# EAGLE board arduino_block-Panel-v10 (EAGLE 6.6.0), part 1 of 4
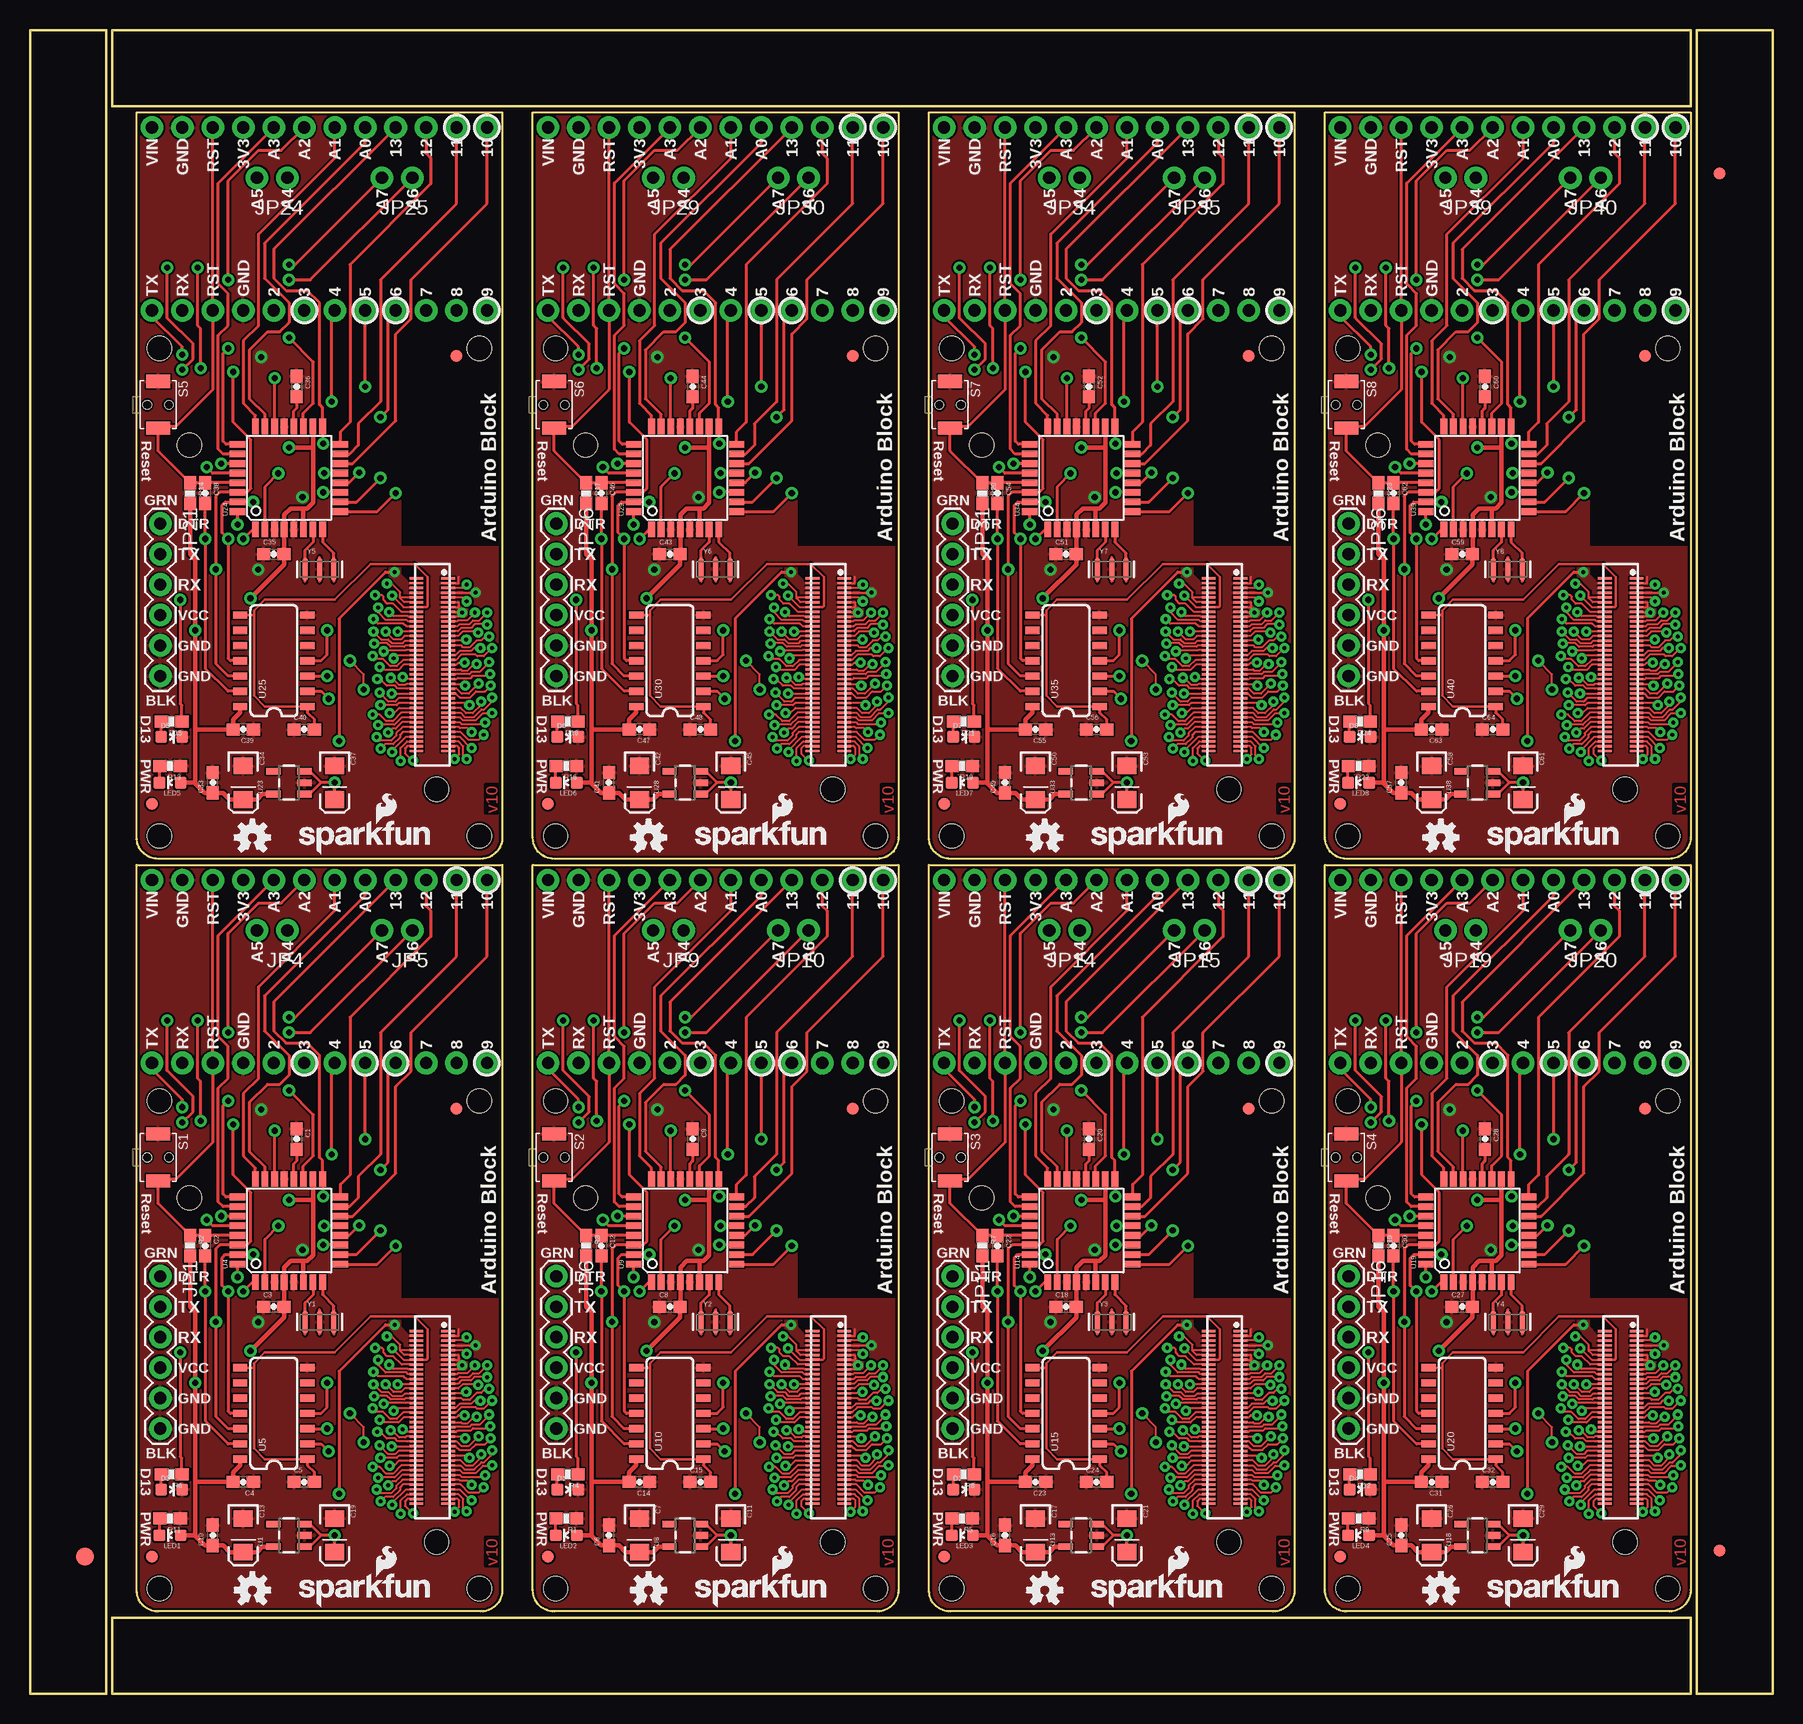
[diagram p0: board, top side]
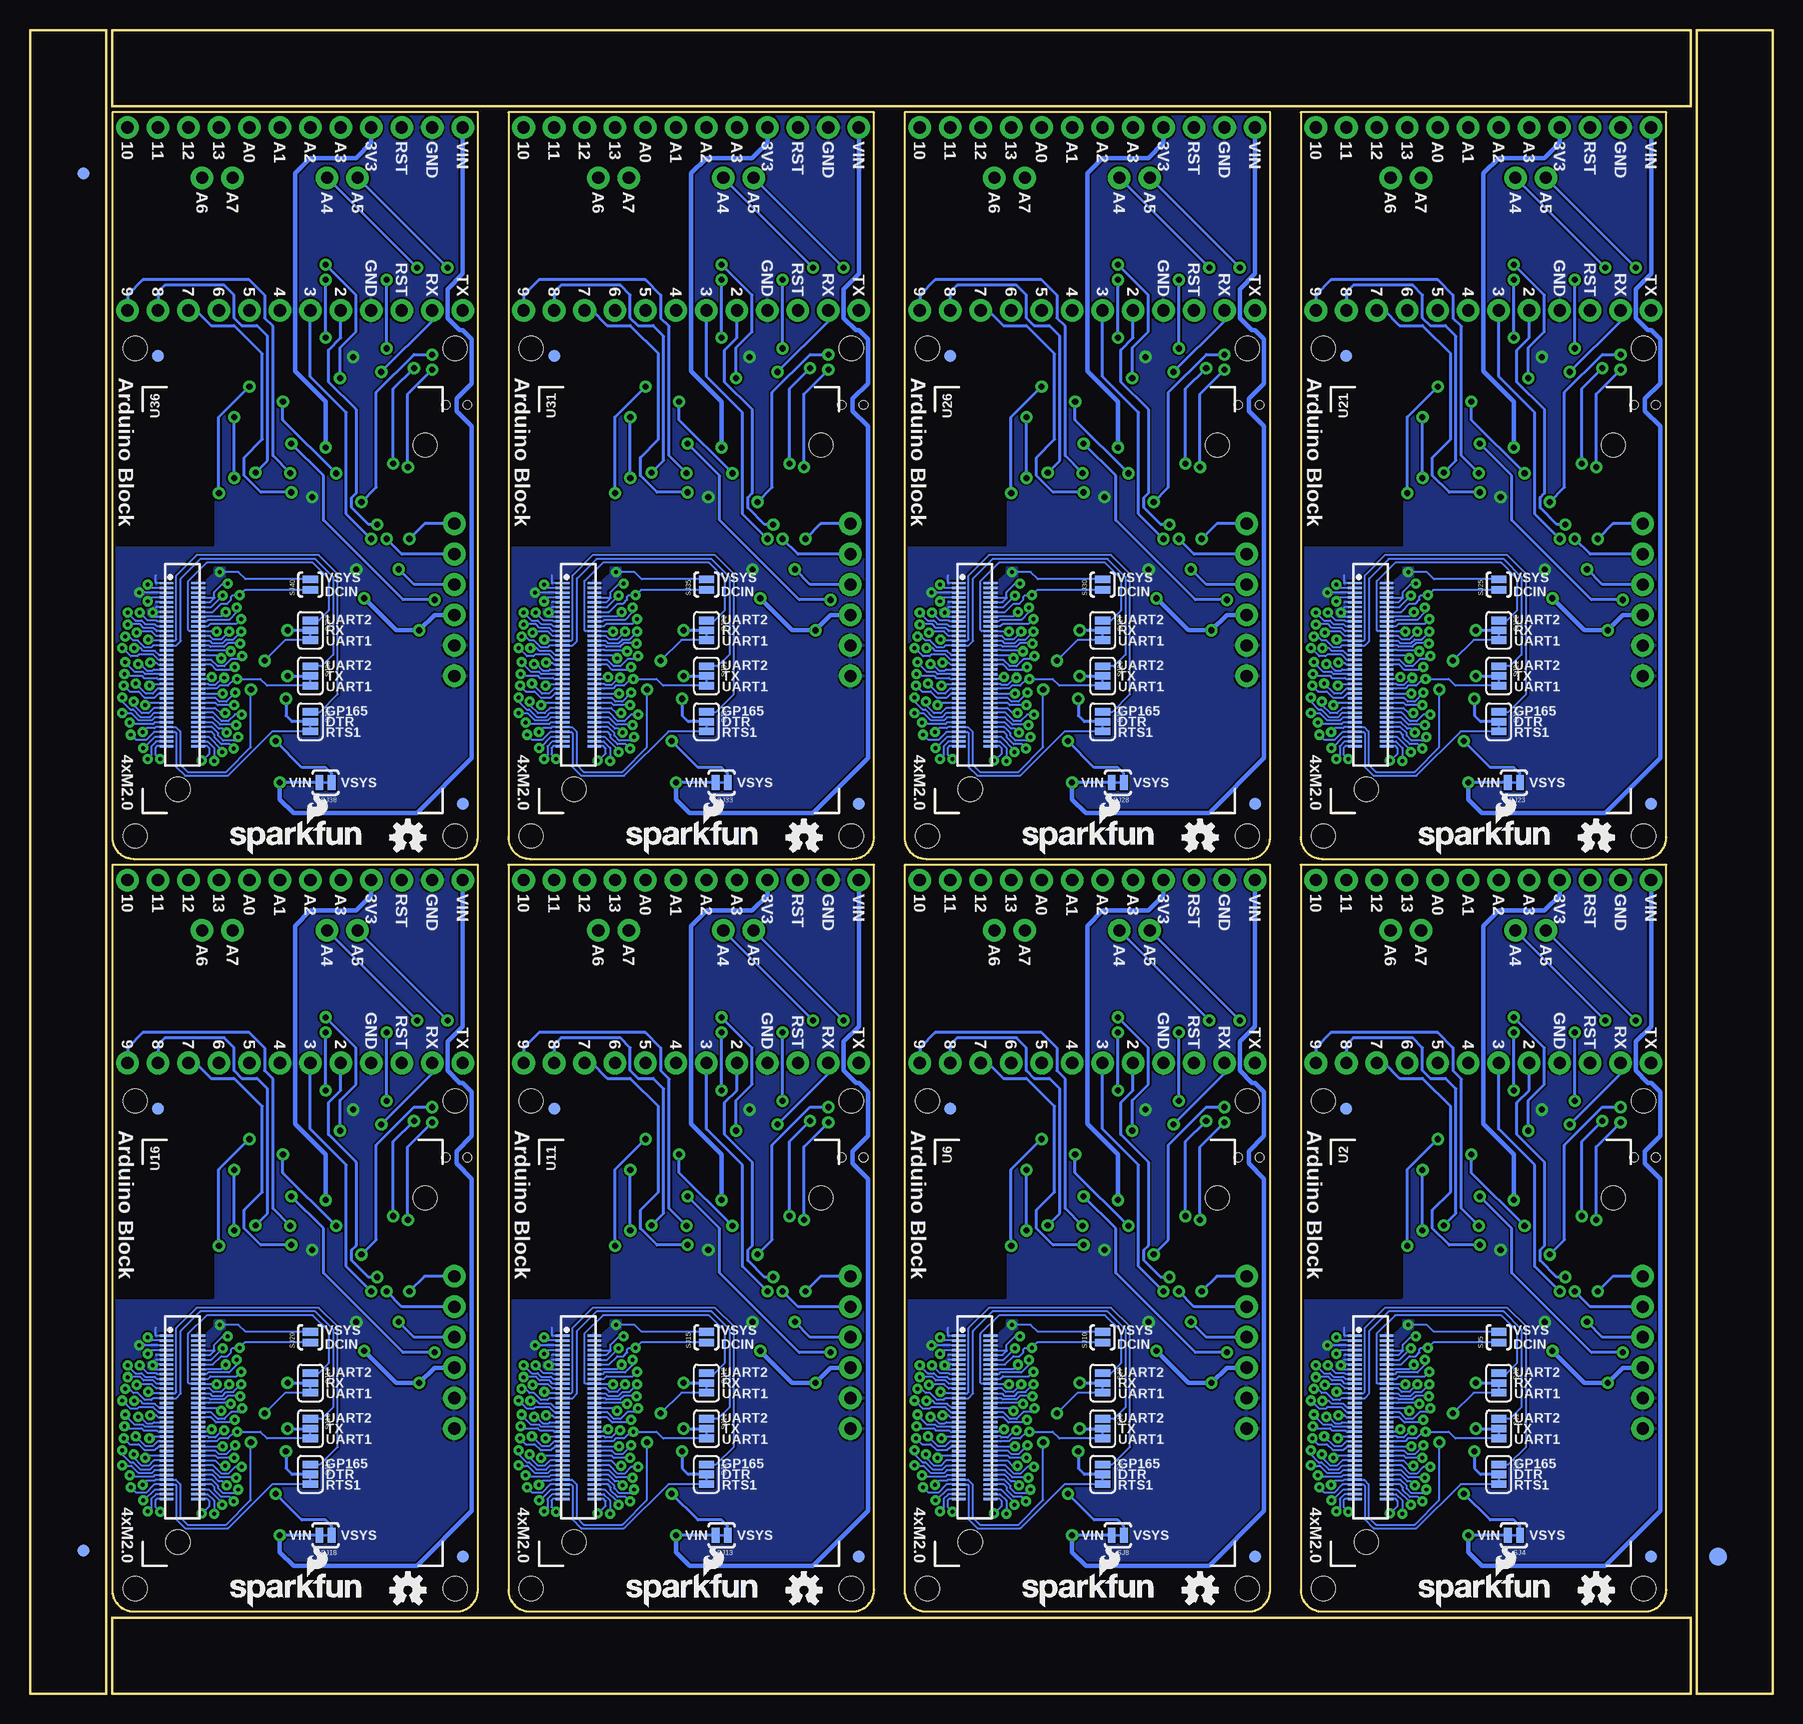
[diagram p1: board, bottom side, seen from below]

Size 145.29 x 138.68 mm. Coordinates in mm from the lower left corner, seen from the top.
Outline: 39.37,69.09 39.37,8.64 arc-90 37.59,6.86 10.67,6.86 arc-90 8.89,8.64 8.89,69.09 39.37,69.09
Outline: 72.39,69.09 72.39,8.64 arc-90 70.61,6.86 43.69,6.86 arc-90 41.91,8.64 41.91,69.09 72.39,69.09
Outline: 105.41,69.09 105.41,8.64 arc-90 103.63,6.86 76.71,6.86 arc-90 74.93,8.64 74.93,69.09 105.41,69.09
Outline: 138.43,69.09 138.43,8.64 arc-90 136.65,6.86 109.73,6.86 arc-90 107.95,8.64 107.95,69.09 138.43,69.09
Outline: 39.37,131.83 39.37,71.37 arc-90 37.59,69.6 10.67,69.6 arc-90 8.89,71.37 8.89,131.83 39.37,131.83
Outline: 72.39,131.83 72.39,71.37 arc-90 70.61,69.6 43.69,69.6 arc-90 41.91,71.37 41.91,131.83 72.39,131.83
Outline: 105.41,131.83 105.41,71.37 arc-90 103.63,69.6 76.71,69.6 arc-90 74.93,71.37 74.93,131.83 105.41,131.83
Outline: 138.43,131.83 138.43,71.37 arc-90 136.65,69.6 109.73,69.6 arc-90 107.95,71.37 107.95,131.83 138.43,131.83
Outline: 6.35,0 6.35,138.68 0,138.68 0,0 6.35,0
Outline: 6.86,0 138.43,0 138.43,6.35 6.86,6.35 6.86,0
Outline: 145.29,0 145.29,138.68 138.94,138.68 138.94,0 145.29,0
Outline: 138.43,138.68 6.86,138.68 6.86,132.33 138.43,132.33 138.43,138.68
Copper layers (1*16): Top 0.035mm / dielectric 1.5mm / Bottom 0.035mm
Design rules "SparkFun-2-layer *": minimum track width 6mil, minimum drill 13mil, track to track 6mil, track to pad 6mil, pad to pad 6mil, via to via 6mil, smd to smd 6mil, copper to edge 8mil, drill to drill 8mil, minimum pad ring 12mil, minimum via ring 10mil, stop-mask expansion 4mil, vias tented up to drill 20mil, thermal gap 6mil
Net classes: 1 vcc: width 0.254 mm
Holes 2 mm at 37.47,8.76 10.79,8.76 10.79,49.4 37.47,49.4 70.48,8.76 43.81,8.76 43.81,49.4 70.48,49.4 103.5,8.76 76.83,8.76 76.83,49.4 103.5,49.4 136.53,8.76 109.86,8.76 109.86,49.4 136.53,49.4 37.47,71.5 10.79,71.5 10.79,112.14 37.47,112.14 70.48,71.5 43.81,71.5 43.81,112.14 70.48,112.14 103.5,71.5 76.83,71.5 76.83,112.14 103.5,112.14 136.53,71.5 109.86,71.5 109.86,112.14 136.53,112.14
tRestrict: area 31,33 to 39.4,51.3; area 64,33 to 72.4,51.3; area 97,33 to 105.4,51.3; area 130,33 to 138.4,51.3; area 31,95.8 to 39.4,114; area 64,95.8 to 72.4,114; area 97,95.8 to 105.4,114; area 130,95.8 to 138.4,114
bRestrict: area 31,33 to 39.4,51.3; area 64,33 to 72.4,51.3; area 97,33 to 105.4,51.3; area 130,33 to 138.4,51.3; area 31,95.8 to 39.4,114; area 64,95.8 to 72.4,114; area 97,95.8 to 105.4,114; area 130,95.8 to 138.4,114

## Footprints (pad centres in the part's own frame; a part is rotated, then mirrored left to right if it is on the bottom)
0603-CAP = smd 1.1 x 1: 1 -0.85,0; 2 0.85,0
EIA3216 = smd 1.4 x 1.6: A 1.4,0; C -1.4,0
0603-LED-ALT1 = smd 1 x 1: A 0,-0.877; C 0,0.877
FIDUCIAL-1.5X3 = smd 1.5 x 1.5: 1 0,0
FIDUCIAL-1X2 = smd 1 x 1: 1 0,0
1X06 = drill 1.016 pad 1.88: 1 0,0; 2 2.54,0; 3 5.08,0; 4 7.62,0; 5 10.16,0; 6 12.7,0
1X12_NO_SILK = drill 1.016 pad 1.88: 1 0,0; 2 2.54,0; 3 5.08,0; 4 7.62,0; 5 10.16,0; 6 12.7,0; 7 15.24,0; 8 17.78,0; 9 20.32,0; 10 22.86,0; 11 25.4,0; 12 27.94,0
1X02_NO_SILK = drill 1.016 pad 1.88: 1 0,0; 2 2.54,0
0603-RES = smd 1.1 x 1: 1 -0.85,0; 2 0.85,0
TACTILE_SWITCH-SMD-RIGHT-ANGLE = smd 1.1 x 2: 1 -1.95,0; 2 1.95,0 | hole 0.7: 0,0.9; 0,-0.9
PAD-JUMPER-3-2OF3_NC_BY_TRACE_YES_SILK_FULL_BOX = smd 0.635 x 1.27: 1 -0.813,0; 2 0,0; 3 0.813,0
PAD-JUMPER-2-NC_BY_TRACE_YES_SILK = smd 0.635 x 1.27: 1 -0.508,0; 2 0.508,0
PAD-JUMPER-2-NO_YES_SILK = smd 0.635 x 1.27: 1 -0.45,0; 2 0.45,0
SOT23-5 = smd 0.55 x 1.2: 1 -0.95,-1.3; 2 0,-1.3; 3 0.95,-1.3; 4 0.95,1.3; 5 -0.95,1.3
EDISON_DAUGHTER = smd 1.14 x 0.2: 1 1.98,19.17; 2 4.62,19.17; 3 1.98,18.77; 4 4.62,18.77; 5 1.98,18.37; 6 4.62,18.37; 7 1.98,17.97; 8 4.62,17.97; 9 1.98,17.57; 10 4.62,17.57; 11 1.98,17.17; 12 4.62,17.17; 13 1.98,16.77; 14 4.62,16.77; 15 1.98,16.37; 16 4.62,16.37; 17 1.98,15.97; 18 4.62,15.97; 19 1.98,15.57; 20 4.62,15.57; 21 1.98,15.17; 22 4.62,15.17; 23 1.98,14.77; 24 4.62,14.77; 25 1.98,14.37; 26 4.62,14.37; 27 1.98,13.97; 28 4.62,13.97; 29 1.98,13.57; 30 4.62,13.57; 31 1.98,13.17; 32 4.62,13.17; 33 1.98,12.77; 34 4.62,12.77; 35 1.98,12.37; 36 4.62,12.37; 37 1.98,11.97; 38 4.62,11.97; 39 1.98,11.57; 40 4.62,11.57; 41 1.98,11.17; 42 4.62,11.17; 43 1.98,10.77; 44 4.62,10.77; 45 1.98,10.37; 46 4.62,10.37; 47 1.98,9.97; 48 4.62,9.97; 49 1.98,9.57; 50 4.62,9.57; 51 1.98,9.17; 52 4.62,9.17; 53 1.98,8.77; 54 4.62,8.77; 55 1.98,8.37; 56 4.62,8.37; 57 1.98,7.97; 58 4.62,7.97; 59 1.98,7.57; 60 4.62,7.57; 61 1.98,7.17; 62 4.62,7.17; 63 1.98,6.77; 64 4.62,6.77; 65 1.98,6.37; 66 4.62,6.37; 67 1.98,5.97; 68 4.62,5.97; 69 1.98,5.57; 70 4.62,5.57 | hole 2: 23.53,30.67; 2.93,1.98
DF40C-70DP-0.4(51) = smd 0.2 x 1.14 bottom: 1 6.8,1.32; 2 6.8,-1.32; 3 6.4,1.32; 4 6.4,-1.32; 5 6,1.32; 6 6,-1.32; 7 5.6,1.32; 8 5.6,-1.32; 9 5.2,1.32; 10 5.2,-1.32; 11 4.8,1.32; 12 4.8,-1.32; 13 4.4,1.32; 14 4.4,-1.32; 15 4,1.32; 16 4,-1.32; 17 3.6,1.32; 18 3.6,-1.32; 19 3.2,1.32; 20 3.2,-1.32; 21 2.8,1.32; 22 2.8,-1.32; 23 2.4,1.32; 24 2.4,-1.32; 25 2,1.32; 26 2,-1.32; 27 1.6,1.32; 28 1.6,-1.32; 29 1.2,1.32; 30 1.2,-1.32; 31 0.8,1.32; 32 0.8,-1.32; 33 0.4,1.32; 34 0.4,-1.32; 35 0,1.32; 36 0,-1.32; 37 -0.4,1.32; 38 -0.4,-1.32; 39 -0.8,1.32; 40 -0.8,-1.32; 41 -1.2,1.32; 42 -1.2,-1.32; 43 -1.6,1.32; 44 -1.6,-1.32; 45 -2,1.32; 46 -2,-1.32; 47 -2.4,1.32; 48 -2.4,-1.32; 49 -2.8,1.32; 50 -2.8,-1.32; 51 -3.2,1.32; 52 -3.2,-1.32; 53 -3.6,1.32; 54 -3.6,-1.32; 55 -4,1.32; 56 -4,-1.32; 57 -4.4,1.32; 58 -4.4,-1.32; 59 -4.8,1.32; 60 -4.8,-1.32; 61 -5.2,1.32; 62 -5.2,-1.32; 63 -5.6,1.32; 64 -5.6,-1.32; 65 -6,1.32; 66 -6,-1.32; 67 -6.4,1.32; 68 -6.4,-1.32; 69 -6.8,1.32; 70 -6.8,-1.32; NC1 7.2,1.32; NC2 7.2,-1.32; NC3 -7.2,-1.32; NC4 -7.2,1.32
TQFP32-08 = smd 1.27 x 0.559: 1 -4.293,2.8; 2 -4.293,2; 3 -4.293,1.2; 4 -4.293,0.4; 5 -4.293,-0.4; 6 -4.293,-1.2; 7 -4.293,-2; 8 -4.293,-2.8; 17 4.293,-2.8; 18 4.293,-2; 19 4.293,-1.2; 20 4.293,-0.4; 21 4.293,0.4; 22 4.293,1.2; 23 4.293,2; 24 4.293,2.8 | smd 0.559 x 1.27: 9 -2.8,-4.293; 10 -2,-4.293; 11 -1.2,-4.293; 12 -0.4,-4.293; 13 0.4,-4.293; 14 1.2,-4.293; 15 2,-4.293; 16 2.8,-4.293; 25 2.8,4.293; 26 2,4.293; 27 1.2,4.293; 28 0.4,4.293; 29 -0.4,4.293; 30 -1.2,4.293; 31 -2,4.293; 32 -2.8,4.293
SO14 = smd 0.6 x 1.2: 1 -3.81,-2.8; 2 -2.54,-2.8; 3 -1.27,-2.8; 4 0,-2.8; 5 1.27,-2.8; 6 2.54,-2.8; 7 3.81,-2.8; 8 3.81,2.8; 9 2.54,2.8; 10 1.27,2.8; 11 0,2.8; 12 -1.27,2.8; 13 -2.54,2.8; 14 -3.81,2.8
RESONATOR-SMD = smd 0.45 x 1.905: 1 -1.2,0; 2 0,0; 3 1.2,0

## Placement (x,y rotation side)
C1  0.1uF  [0603-CAP]  22.23,46.23 270 top
C2  0.1uF  [0603-CAP]  14.61,37.34 270 top
C3  0.1uF  [0603-CAP]  20.32,32.26 0 top
C4  0.1uF  [0603-CAP]  17.78,17.65 180 top
C5  0.1uF  [0603-CAP]  22.86,17.65 0 top
C6  0.1uF  [0603-CAP]  48.26,13.21 90 top
C7  10uF  [EIA3216]  50.8,13.21 270 top
C8  0.1uF  [0603-CAP]  53.34,32.26 0 top
C9  0.1uF  [0603-CAP]  55.24,46.23 270 top
C10  0.1uF  [0603-CAP]  15.24,13.21 90 top
C11  10uF  [EIA3216]  58.42,13.21 270 top
C12  0.1uF  [0603-CAP]  47.62,37.34 270 top
C13  10uF  [EIA3216]  17.78,13.21 270 top
C14  0.1uF  [0603-CAP]  50.8,17.65 180 top
C15  0.1uF  [0603-CAP]  55.88,17.65 0 top
C16  0.1uF  [0603-CAP]  81.28,13.21 90 top
C17  10uF  [EIA3216]  83.82,13.21 270 top
C18  0.1uF  [0603-CAP]  86.36,32.26 0 top
C19  10uF  [EIA3216]  25.4,13.21 270 top
C20  0.1uF  [0603-CAP]  88.27,46.23 270 top
C21  10uF  [EIA3216]  91.44,13.21 270 top
C22  0.1uF  [0603-CAP]  80.64,37.34 270 top
C23  0.1uF  [0603-CAP]  83.82,17.65 180 top
C24  0.1uF  [0603-CAP]  88.9,17.65 0 top
C25  0.1uF  [0603-CAP]  114.3,13.21 90 top
C26  10uF  [EIA3216]  116.84,13.21 270 top
C27  0.1uF  [0603-CAP]  119.38,32.26 0 top
C28  0.1uF  [0603-CAP]  121.28,46.23 270 top
C29  10uF  [EIA3216]  124.46,13.21 270 top
C30  0.1uF  [0603-CAP]  113.67,37.34 270 top
C31  0.1uF  [0603-CAP]  116.84,17.65 180 top
C32  0.1uF  [0603-CAP]  121.92,17.65 0 top
C33  0.1uF  [0603-CAP]  15.24,75.95 90 top
C34  10uF  [EIA3216]  17.78,75.95 270 top
C35  0.1uF  [0603-CAP]  20.32,95 0 top
C36  0.1uF  [0603-CAP]  22.23,108.97 270 top
C37  10uF  [EIA3216]  25.4,75.95 270 top
C38  0.1uF  [0603-CAP]  14.61,100.08 270 top
C39  0.1uF  [0603-CAP]  17.78,80.39 180 top
C40  0.1uF  [0603-CAP]  22.86,80.39 0 top
C41  0.1uF  [0603-CAP]  48.26,75.95 90 top
C42  10uF  [EIA3216]  50.8,75.95 270 top
C43  0.1uF  [0603-CAP]  53.34,95 0 top
C44  0.1uF  [0603-CAP]  55.24,108.97 270 top
C45  10uF  [EIA3216]  58.42,75.95 270 top
C46  0.1uF  [0603-CAP]  47.62,100.08 270 top
C47  0.1uF  [0603-CAP]  50.8,80.39 180 top
C48  0.1uF  [0603-CAP]  55.88,80.39 0 top
C49  0.1uF  [0603-CAP]  81.28,75.95 90 top
C50  10uF  [EIA3216]  83.82,75.95 270 top
C51  0.1uF  [0603-CAP]  86.36,95 0 top
C52  0.1uF  [0603-CAP]  88.27,108.97 270 top
C53  10uF  [EIA3216]  91.44,75.95 270 top
C54  0.1uF  [0603-CAP]  80.64,100.08 270 top
C55  0.1uF  [0603-CAP]  83.82,80.39 180 top
C56  0.1uF  [0603-CAP]  88.9,80.39 0 top
C57  0.1uF  [0603-CAP]  114.3,75.95 90 top
C58  10uF  [EIA3216]  116.84,75.95 270 top
C59  0.1uF  [0603-CAP]  119.38,95 0 top
C60  0.1uF  [0603-CAP]  121.28,108.97 270 top
C61  10uF  [EIA3216]  124.46,75.95 270 top
C62  0.1uF  [0603-CAP]  113.67,100.08 270 top
C63  0.1uF  [0603-CAP]  116.84,80.39 180 top
C64  0.1uF  [0603-CAP]  121.92,80.39 0 top
D1  Green  [0603-LED-ALT1]  44.83,17.02 270 top
D2  Green  [0603-LED-ALT1]  77.85,17.02 270 top
D3  Green  [0603-LED-ALT1]  11.81,17.02 270 top
D4  Green  [0603-LED-ALT1]  110.87,17.02 270 top
D5  Green  [0603-LED-ALT1]  11.81,79.76 270 top
D6  Green  [0603-LED-ALT1]  44.83,79.76 270 top
D7  Green  [0603-LED-ALT1]  77.85,79.76 270 top
D8  Green  [0603-LED-ALT1]  110.87,79.76 270 top
E$1  [FIDUCIAL-1.5X3]  4.57,11.43 0 top
E$2  [FIDUCIAL-1.5X3]  4.57,11.43 0 bottom
E$3  [FIDUCIAL-1X2]  140.84,126.75 180 bottom
E$4  [FIDUCIAL-1X2]  140.84,11.94 0 top
E$5  [FIDUCIAL-1X2]  140.84,126.75 180 top
E$6  [FIDUCIAL-1X2]  140.84,11.94 0 bottom
FID1  FIDUCIAL1X2  [FIDUCIAL-1X2]  10.16,11.43 0 top
FID2  FIDUCIAL1X2  [FIDUCIAL-1X2]  35.56,48.77 0 top
FID3  FIDUCIAL1X2  [FIDUCIAL-1X2]  10.16,11.43 0 bottom
FID4  FIDUCIAL1X2  [FIDUCIAL-1X2]  35.56,48.77 0 bottom
FID5  FIDUCIAL1X2  [FIDUCIAL-1X2]  43.18,11.43 0 top
FID6  FIDUCIAL1X2  [FIDUCIAL-1X2]  68.58,48.77 0 top
FID7  FIDUCIAL1X2  [FIDUCIAL-1X2]  43.18,11.43 0 bottom
FID8  FIDUCIAL1X2  [FIDUCIAL-1X2]  68.58,48.77 0 bottom
FID9  FIDUCIAL1X2  [FIDUCIAL-1X2]  76.2,11.43 0 top
FID10  FIDUCIAL1X2  [FIDUCIAL-1X2]  101.6,48.77 0 top
FID11  FIDUCIAL1X2  [FIDUCIAL-1X2]  76.2,11.43 0 bottom
FID12  FIDUCIAL1X2  [FIDUCIAL-1X2]  101.6,48.77 0 bottom
FID13  FIDUCIAL1X2  [FIDUCIAL-1X2]  109.22,11.43 0 top
FID14  FIDUCIAL1X2  [FIDUCIAL-1X2]  134.62,48.77 0 top
FID15  FIDUCIAL1X2  [FIDUCIAL-1X2]  109.22,11.43 0 bottom
FID16  FIDUCIAL1X2  [FIDUCIAL-1X2]  134.62,48.77 0 bottom
FID17  FIDUCIAL1X2  [FIDUCIAL-1X2]  10.16,74.17 0 top
FID18  FIDUCIAL1X2  [FIDUCIAL-1X2]  35.56,111.51 0 top
FID19  FIDUCIAL1X2  [FIDUCIAL-1X2]  10.16,74.17 0 bottom
FID20  FIDUCIAL1X2  [FIDUCIAL-1X2]  35.56,111.51 0 bottom
FID21  FIDUCIAL1X2  [FIDUCIAL-1X2]  43.18,74.17 0 top
FID22  FIDUCIAL1X2  [FIDUCIAL-1X2]  68.58,111.51 0 top
FID23  FIDUCIAL1X2  [FIDUCIAL-1X2]  43.18,74.17 0 bottom
FID24  FIDUCIAL1X2  [FIDUCIAL-1X2]  68.58,111.51 0 bottom
FID25  FIDUCIAL1X2  [FIDUCIAL-1X2]  76.2,74.17 0 top
FID26  FIDUCIAL1X2  [FIDUCIAL-1X2]  101.6,111.51 0 top
FID27  FIDUCIAL1X2  [FIDUCIAL-1X2]  76.2,74.17 0 bottom
FID28  FIDUCIAL1X2  [FIDUCIAL-1X2]  101.6,111.51 0 bottom
FID29  FIDUCIAL1X2  [FIDUCIAL-1X2]  109.22,74.17 0 top
FID30  FIDUCIAL1X2  [FIDUCIAL-1X2]  134.62,111.51 0 top
FID31  FIDUCIAL1X2  [FIDUCIAL-1X2]  109.22,74.17 0 bottom
FID32  FIDUCIAL1X2  [FIDUCIAL-1X2]  134.62,111.51 0 bottom
JP1  FTDI Basic  [1X06]  10.86,34.8 270 top
JP2  M12NO_SILK  [1X12_NO_SILK]  10.16,67.82 0 top
JP3  M12NO_SILK  [1X12_NO_SILK]  10.16,52.58 0 top
JP4  M021X02_NO_SILK  [1X02_NO_SILK]  21.46,63.63 180 top
JP5  M021X02_NO_SILK  [1X02_NO_SILK]  31.88,63.63 180 top
JP6  FTDI Basic  [1X06]  43.88,34.8 270 top
JP7  M12NO_SILK  [1X12_NO_SILK]  43.18,67.82 0 top
JP8  M12NO_SILK  [1X12_NO_SILK]  43.18,52.58 0 top
JP9  M021X02_NO_SILK  [1X02_NO_SILK]  54.48,63.63 180 top
JP10  M021X02_NO_SILK  [1X02_NO_SILK]  64.9,63.63 180 top
JP11  FTDI Basic  [1X06]  76.9,34.8 270 top
JP12  M12NO_SILK  [1X12_NO_SILK]  76.2,67.82 0 top
JP13  M12NO_SILK  [1X12_NO_SILK]  76.2,52.58 0 top
JP14  M021X02_NO_SILK  [1X02_NO_SILK]  87.5,63.63 180 top
JP15  M021X02_NO_SILK  [1X02_NO_SILK]  97.92,63.63 180 top
JP16  FTDI Basic  [1X06]  109.92,34.8 270 top
JP17  M12NO_SILK  [1X12_NO_SILK]  109.22,67.82 0 top
JP18  M12NO_SILK  [1X12_NO_SILK]  109.22,52.58 0 top
JP19  M021X02_NO_SILK  [1X02_NO_SILK]  120.52,63.63 180 top
JP20  M021X02_NO_SILK  [1X02_NO_SILK]  130.94,63.63 180 top
JP21  FTDI Basic  [1X06]  10.86,97.54 270 top
JP22  M12NO_SILK  [1X12_NO_SILK]  10.16,130.56 0 top
JP23  M12NO_SILK  [1X12_NO_SILK]  10.16,115.32 0 top
JP24  M021X02_NO_SILK  [1X02_NO_SILK]  21.46,126.36 180 top
JP25  M021X02_NO_SILK  [1X02_NO_SILK]  31.88,126.36 180 top
JP26  FTDI Basic  [1X06]  43.88,97.54 270 top
JP27  M12NO_SILK  [1X12_NO_SILK]  43.18,130.56 0 top
JP28  M12NO_SILK  [1X12_NO_SILK]  43.18,115.32 0 top
JP29  M021X02_NO_SILK  [1X02_NO_SILK]  54.48,126.36 180 top
JP30  M021X02_NO_SILK  [1X02_NO_SILK]  64.9,126.36 180 top
JP31  FTDI Basic  [1X06]  76.9,97.54 270 top
JP32  M12NO_SILK  [1X12_NO_SILK]  76.2,130.56 0 top
JP33  M12NO_SILK  [1X12_NO_SILK]  76.2,115.32 0 top
JP34  M021X02_NO_SILK  [1X02_NO_SILK]  87.5,126.36 180 top
JP35  M021X02_NO_SILK  [1X02_NO_SILK]  97.92,126.36 180 top
JP36  FTDI Basic  [1X06]  109.92,97.54 270 top
JP37  M12NO_SILK  [1X12_NO_SILK]  109.22,130.56 0 top
JP38  M12NO_SILK  [1X12_NO_SILK]  109.22,115.32 0 top
JP39  M021X02_NO_SILK  [1X02_NO_SILK]  120.52,126.36 180 top
JP40  M021X02_NO_SILK  [1X02_NO_SILK]  130.94,126.36 180 top
LED1  Red  [0603-LED-ALT1]  11.68,13.21 90 top
LED2  Red  [0603-LED-ALT1]  44.7,13.21 90 top
LED3  Red  [0603-LED-ALT1]  77.72,13.21 90 top
LED4  Red  [0603-LED-ALT1]  110.74,13.21 90 top
LED5  Red  [0603-LED-ALT1]  11.68,75.95 90 top
LED6  Red  [0603-LED-ALT1]  44.7,75.95 90 top
LED7  Red  [0603-LED-ALT1]  77.72,75.95 90 top
LED8  Red  [0603-LED-ALT1]  110.74,75.95 90 top
LOGO1  OSHW-LOGOS  [OSHW-LOGO-S]  18.54,8.64 0 top
LOGO2  OSHW-LOGOS  [OSHW-LOGO-S]  14.73,8.64 0 bottom
LOGO3  SFE_LOGO_NAME_FLAME.1_INCH  [SFE_LOGO_NAME_FLAME_.1]  29.97,7.11 0 bottom
LOGO4  SFE_LOGO_NAME_FLAME.1_INCH  [SFE_LOGO_NAME_FLAME_.1]  22,7.11 0 top
LOGO5  OSHW-LOGOS  [OSHW-LOGO-S]  47.75,8.64 0 bottom
LOGO6  SFE_LOGO_NAME_FLAME.1_INCH  [SFE_LOGO_NAME_FLAME_.1]  62.99,7.11 0 bottom
LOGO7  OSHW-LOGOS  [OSHW-LOGO-S]  51.56,8.64 0 top
LOGO8  SFE_LOGO_NAME_FLAME.1_INCH  [SFE_LOGO_NAME_FLAME_.1]  55.02,7.11 0 top
LOGO9  OSHW-LOGOS  [OSHW-LOGO-S]  80.77,8.64 0 bottom
LOGO10  SFE_LOGO_NAME_FLAME.1_INCH  [SFE_LOGO_NAME_FLAME_.1]  96.01,7.11 0 bottom
LOGO11  OSHW-LOGOS  [OSHW-LOGO-S]  84.58,8.64 0 top
LOGO12  SFE_LOGO_NAME_FLAME.1_INCH  [SFE_LOGO_NAME_FLAME_.1]  88.04,7.11 0 top
LOGO13  OSHW-LOGOS  [OSHW-LOGO-S]  113.79,8.64 0 bottom
LOGO14  SFE_LOGO_NAME_FLAME.1_INCH  [SFE_LOGO_NAME_FLAME_.1]  129.03,7.11 0 bottom
LOGO15  OSHW-LOGOS  [OSHW-LOGO-S]  117.6,8.64 0 top
LOGO16  SFE_LOGO_NAME_FLAME.1_INCH  [SFE_LOGO_NAME_FLAME_.1]  121.06,7.11 0 top
LOGO17  OSHW-LOGOS  [OSHW-LOGO-S]  14.73,71.37 0 bottom
LOGO18  SFE_LOGO_NAME_FLAME.1_INCH  [SFE_LOGO_NAME_FLAME_.1]  29.97,69.85 0 bottom
LOGO19  OSHW-LOGOS  [OSHW-LOGO-S]  18.54,71.37 0 top
LOGO20  SFE_LOGO_NAME_FLAME.1_INCH  [SFE_LOGO_NAME_FLAME_.1]  22,69.85 0 top
LOGO21  OSHW-LOGOS  [OSHW-LOGO-S]  47.75,71.37 0 bottom
LOGO22  SFE_LOGO_NAME_FLAME.1_INCH  [SFE_LOGO_NAME_FLAME_.1]  62.99,69.85 0 bottom
LOGO23  OSHW-LOGOS  [OSHW-LOGO-S]  51.56,71.37 0 top
LOGO24  SFE_LOGO_NAME_FLAME.1_INCH  [SFE_LOGO_NAME_FLAME_.1]  55.02,69.85 0 top
LOGO25  OSHW-LOGOS  [OSHW-LOGO-S]  80.77,71.37 0 bottom
LOGO26  SFE_LOGO_NAME_FLAME.1_INCH  [SFE_LOGO_NAME_FLAME_.1]  96.01,69.85 0 bottom
LOGO27  OSHW-LOGOS  [OSHW-LOGO-S]  84.58,71.37 0 top
LOGO28  SFE_LOGO_NAME_FLAME.1_INCH  [SFE_LOGO_NAME_FLAME_.1]  88.04,69.85 0 top
LOGO29  OSHW-LOGOS  [OSHW-LOGO-S]  113.79,71.37 0 bottom
LOGO30  SFE_LOGO_NAME_FLAME.1_INCH  [SFE_LOGO_NAME_FLAME_.1]  129.03,69.85 0 bottom
LOGO31  OSHW-LOGOS  [OSHW-LOGO-S]  117.6,71.37 0 top
LOGO32  SFE_LOGO_NAME_FLAME.1_INCH  [SFE_LOGO_NAME_FLAME_.1]  121.06,69.85 0 top
R1  10K  [0603-RES]  44.7,14.61 180 top
R2  10K  [0603-RES]  13.34,37.34 270 top
R3  10K  [0603-RES]  46.35,37.34 270 top
R4  330  [0603-RES]  44.83,18.29 180 top
R5  10K  [0603-RES]  77.72,14.61 180 top
R6  330  [0603-RES]  11.81,18.29 180 top
R7  10K  [0603-RES]  79.38,37.34 270 top
R8  330  [0603-RES]  77.85,18.29 180 top
R9  10K  [0603-RES]  110.74,14.61 180 top
R10  10K  [0603-RES]  112.39,37.34 270 top
R11  10K  [0603-RES]  11.68,14.61 180 top
R12  330  [0603-RES]  110.87,18.29 180 top
R13  10K  [0603-RES]  11.68,77.34 180 top
R14  10K  [0603-RES]  13.34,100.08 270 top
R15  330  [0603-RES]  11.81,81.03 180 top
R16  10K  [0603-RES]  44.7,77.34 180 top
R17  10K  [0603-RES]  46.35,100.08 270 top
R18  330  [0603-RES]  44.83,81.03 180 top
R19  10K  [0603-RES]  77.72,77.34 180 top
R20  10K  [0603-RES]  79.38,100.08 270 top
R21  330  [0603-RES]  77.85,81.03 180 top
R22  10K  [0603-RES]  110.74,77.34 180 top
R23  10K  [0603-RES]  112.39,100.08 270 top
R24  330  [0603-RES]  110.87,81.03 180 top
S1  RESET  [TACTILE_SWITCH-SMD-RIGHT-ANGLE]  10.67,44.7 270 top
S2  RESET  [TACTILE_SWITCH-SMD-RIGHT-ANGLE]  43.69,44.7 270 top
S3  RESET  [TACTILE_SWITCH-SMD-RIGHT-ANGLE]  76.71,44.7 270 top
S4  RESET  [TACTILE_SWITCH-SMD-RIGHT-ANGLE]  109.73,44.7 270 top
S5  RESET  [TACTILE_SWITCH-SMD-RIGHT-ANGLE]  10.67,107.44 270 top
S6  RESET  [TACTILE_SWITCH-SMD-RIGHT-ANGLE]  43.69,107.44 270 top
S7  RESET  [TACTILE_SWITCH-SMD-RIGHT-ANGLE]  76.71,107.44 270 top
S8  RESET  [TACTILE_SWITCH-SMD-RIGHT-ANGLE]  109.73,107.44 270 top
SJ1  TX  [PAD-JUMPER-3-2OF3_NC_BY_TRACE_YES_SILK_FULL_BOX]  22.86,22.1 270 bottom
SJ2  RX  [PAD-JUMPER-3-2OF3_NC_BY_TRACE_YES_SILK_FULL_BOX]  22.86,25.91 270 bottom
SJ3  TX  [PAD-JUMPER-3-2OF3_NC_BY_TRACE_YES_SILK_FULL_BOX]  22.86,18.29 270 bottom
SJ4  VIN  [PAD-JUMPER-2-NC_BY_TRACE_YES_SILK]  21.59,13.21 180 bottom
SJ5  DCIN  [PAD-JUMPER-2-NO_YES_SILK]  22.86,29.72 90 bottom
SJ6  TX  [PAD-JUMPER-3-2OF3_NC_BY_TRACE_YES_SILK_FULL_BOX]  55.88,22.1 270 bottom
SJ7  RX  [PAD-JUMPER-3-2OF3_NC_BY_TRACE_YES_SILK_FULL_BOX]  55.88,25.91 270 bottom
SJ8  VIN  [PAD-JUMPER-2-NC_BY_TRACE_YES_SILK]  54.61,13.21 180 bottom
SJ9  TX  [PAD-JUMPER-3-2OF3_NC_BY_TRACE_YES_SILK_FULL_BOX]  55.88,18.29 270 bottom
SJ10  DCIN  [PAD-JUMPER-2-NO_YES_SILK]  55.88,29.72 90 bottom
SJ11  TX  [PAD-JUMPER-3-2OF3_NC_BY_TRACE_YES_SILK_FULL_BOX]  88.9,22.1 270 bottom
SJ12  RX  [PAD-JUMPER-3-2OF3_NC_BY_TRACE_YES_SILK_FULL_BOX]  88.9,25.91 270 bottom
SJ13  VIN  [PAD-JUMPER-2-NC_BY_TRACE_YES_SILK]  87.63,13.21 180 bottom
SJ14  TX  [PAD-JUMPER-3-2OF3_NC_BY_TRACE_YES_SILK_FULL_BOX]  88.9,18.29 270 bottom
SJ15  DCIN  [PAD-JUMPER-2-NO_YES_SILK]  88.9,29.72 90 bottom
SJ16  TX  [PAD-JUMPER-3-2OF3_NC_BY_TRACE_YES_SILK_FULL_BOX]  121.92,22.1 270 bottom
SJ17  RX  [PAD-JUMPER-3-2OF3_NC_BY_TRACE_YES_SILK_FULL_BOX]  121.92,25.91 270 bottom
SJ18  VIN  [PAD-JUMPER-2-NC_BY_TRACE_YES_SILK]  120.65,13.21 180 bottom
SJ19  TX  [PAD-JUMPER-3-2OF3_NC_BY_TRACE_YES_SILK_FULL_BOX]  121.92,18.29 270 bottom
SJ20  DCIN  [PAD-JUMPER-2-NO_YES_SILK]  121.92,29.72 90 bottom
SJ21  TX  [PAD-JUMPER-3-2OF3_NC_BY_TRACE_YES_SILK_FULL_BOX]  22.86,84.84 270 bottom
SJ22  RX  [PAD-JUMPER-3-2OF3_NC_BY_TRACE_YES_SILK_FULL_BOX]  22.86,88.65 270 bottom
SJ23  VIN  [PAD-JUMPER-2-NC_BY_TRACE_YES_SILK]  21.59,75.95 180 bottom
SJ24  TX  [PAD-JUMPER-3-2OF3_NC_BY_TRACE_YES_SILK_FULL_BOX]  22.86,81.03 270 bottom
SJ25  DCIN  [PAD-JUMPER-2-NO_YES_SILK]  22.86,92.46 90 bottom
SJ26  TX  [PAD-JUMPER-3-2OF3_NC_BY_TRACE_YES_SILK_FULL_BOX]  55.88,84.84 270 bottom
SJ27  RX  [PAD-JUMPER-3-2OF3_NC_BY_TRACE_YES_SILK_FULL_BOX]  55.88,88.65 270 bottom
SJ28  VIN  [PAD-JUMPER-2-NC_BY_TRACE_YES_SILK]  54.61,75.95 180 bottom
SJ29  TX  [PAD-JUMPER-3-2OF3_NC_BY_TRACE_YES_SILK_FULL_BOX]  55.88,81.03 270 bottom
SJ30  DCIN  [PAD-JUMPER-2-NO_YES_SILK]  55.88,92.46 90 bottom
SJ31  TX  [PAD-JUMPER-3-2OF3_NC_BY_TRACE_YES_SILK_FULL_BOX]  88.9,84.84 270 bottom
SJ32  RX  [PAD-JUMPER-3-2OF3_NC_BY_TRACE_YES_SILK_FULL_BOX]  88.9,88.65 270 bottom
SJ33  VIN  [PAD-JUMPER-2-NC_BY_TRACE_YES_SILK]  87.63,75.95 180 bottom
SJ34  TX  [PAD-JUMPER-3-2OF3_NC_BY_TRACE_YES_SILK_FULL_BOX]  88.9,81.03 270 bottom
SJ35  DCIN  [PAD-JUMPER-2-NO_YES_SILK]  88.9,92.46 90 bottom
SJ36  TX  [PAD-JUMPER-3-2OF3_NC_BY_TRACE_YES_SILK_FULL_BOX]  121.92,84.84 270 bottom
SJ37  RX  [PAD-JUMPER-3-2OF3_NC_BY_TRACE_YES_SILK_FULL_BOX]  121.92,88.65 270 bottom
SJ38  VIN  [PAD-JUMPER-2-NC_BY_TRACE_YES_SILK]  120.65,75.95 180 bottom
SJ39  TX  [PAD-JUMPER-3-2OF3_NC_BY_TRACE_YES_SILK_FULL_BOX]  121.92,81.03 270 bottom
SJ40  DCIN  [PAD-JUMPER-2-NO_YES_SILK]  121.92,92.46 90 bottom
U1  MIC5205-3.3V (150mA)  [SOT23-5]  21.59,13.21 90 top
U2  EDISON_CONNECTOR_FULLMOUNTING_HOLES  [EDISON_DAUGHTER]  36.83,10.67 0 bottom
U3  EDISON_CONNECTOR_FULLHEADER  [DF40C-70DP-0.4(51)]  33.53,23.04 90 bottom
U4  ATMEGA328  [TQFP32-08]  21.59,38.61 90 top
U5  [SO14]  20.32,23.37 90 top
U6  EDISON_CONNECTOR_FULLMOUNTING_HOLES  [EDISON_DAUGHTER]  69.85,10.67 0 bottom
U7  EDISON_CONNECTOR_FULLHEADER  [DF40C-70DP-0.4(51)]  66.55,23.04 90 bottom
U8  MIC5205-3.3V (150mA)  [SOT23-5]  54.61,13.21 90 top
U9  ATMEGA328  [TQFP32-08]  54.61,38.61 90 top
U10  [SO14]  53.34,23.37 90 top
U11  EDISON_CONNECTOR_FULLMOUNTING_HOLES  [EDISON_DAUGHTER]  102.87,10.67 0 bottom
U12  EDISON_CONNECTOR_FULLHEADER  [DF40C-70DP-0.4(51)]  99.57,23.04 90 bottom
U13  MIC5205-3.3V (150mA)  [SOT23-5]  87.63,13.21 90 top
U14  ATMEGA328  [TQFP32-08]  87.63,38.61 90 top
U15  [SO14]  86.36,23.37 90 top
U16  EDISON_CONNECTOR_FULLMOUNTING_HOLES  [EDISON_DAUGHTER]  135.89,10.67 0 bottom
U17  EDISON_CONNECTOR_FULLHEADER  [DF40C-70DP-0.4(51)]  132.59,23.04 90 bottom
U18  MIC5205-3.3V (150mA)  [SOT23-5]  120.65,13.21 90 top
U19  ATMEGA328  [TQFP32-08]  120.65,38.61 90 top
U20  [SO14]  119.38,23.37 90 top
U21  EDISON_CONNECTOR_FULLMOUNTING_HOLES  [EDISON_DAUGHTER]  36.83,73.41 0 bottom
U22  EDISON_CONNECTOR_FULLHEADER  [DF40C-70DP-0.4(51)]  33.53,85.78 90 bottom
U23  MIC5205-3.3V (150mA)  [SOT23-5]  21.59,75.95 90 top
U24  ATMEGA328  [TQFP32-08]  21.59,101.35 90 top
U25  [SO14]  20.32,86.11 90 top
U26  EDISON_CONNECTOR_FULLMOUNTING_HOLES  [EDISON_DAUGHTER]  69.85,73.41 0 bottom
U27  EDISON_CONNECTOR_FULLHEADER  [DF40C-70DP-0.4(51)]  66.55,85.78 90 bottom
U28  MIC5205-3.3V (150mA)  [SOT23-5]  54.61,75.95 90 top
U29  ATMEGA328  [TQFP32-08]  54.61,101.35 90 top
U30  [SO14]  53.34,86.11 90 top
U31  EDISON_CONNECTOR_FULLMOUNTING_HOLES  [EDISON_DAUGHTER]  102.87,73.41 0 bottom
U32  EDISON_CONNECTOR_FULLHEADER  [DF40C-70DP-0.4(51)]  99.57,85.78 90 bottom
U33  MIC5205-3.3V (150mA)  [SOT23-5]  87.63,75.95 90 top
U34  ATMEGA328  [TQFP32-08]  87.63,101.35 90 top
U35  [SO14]  86.36,86.11 90 top
U36  EDISON_CONNECTOR_FULLMOUNTING_HOLES  [EDISON_DAUGHTER]  135.89,73.41 0 bottom
U37  EDISON_CONNECTOR_FULLHEADER  [DF40C-70DP-0.4(51)]  132.59,85.78 90 bottom
U38  MIC5205-3.3V (150mA)  [SOT23-5]  120.65,75.95 90 top
U39  ATMEGA328  [TQFP32-08]  120.65,101.35 90 top
U40  [SO14]  119.38,86.11 90 top
Y1  8MHZ  [RESONATOR-SMD]  24.13,30.99 0 top
Y2  8MHZ  [RESONATOR-SMD]  57.15,30.99 0 top
Y3  8MHZ  [RESONATOR-SMD]  90.17,30.99 0 top
Y4  8MHZ  [RESONATOR-SMD]  123.19,30.99 0 top
Y5  8MHZ  [RESONATOR-SMD]  24.13,93.73 0 top
Y6  8MHZ  [RESONATOR-SMD]  57.15,93.73 0 top
Y7  8MHZ  [RESONATOR-SMD]  90.17,93.73 0 top
Y8  8MHZ  [RESONATOR-SMD]  123.19,93.73 0 top

## Library data of the parts
C1-C64 JP1 JP6 JP11 JP16 JP21 JP26 JP31 JP36 R1-R24 U1 U4 U8 U9 U13 U14 U18 U19 U23 U24 U28 U29 U33 U34 U38 U39 = SparkFun
D1-D8 LED1-LED8 = Testing
E$1 E$2 = SparkFun-Retired
E$3-E$6 FID1-FID32 LOGO1-LOGO32 = SparkFun-Aesthetics
JP2-JP5 JP7-JP10 JP12-JP15 JP17-JP20 JP22-JP25 JP27-JP30 JP32-JP35 JP37-JP40 = SparkFun-Connectors
S1-S8 = SparkFun-Electromechanical; PROD_ID: COMP-12265
SJ1-SJ40 = SparkFun-Passives
U2 U3 U6 U7 U11 U12 U16 U17 U21 U22 U26 U27 U31 U32 U36 U37 = Edison
U5 U10 U15 U20 U25 U30 U35 U40 = SparkFun-DigitalIC; PROD_ID: IC-11329
Y1-Y8 = SparkFun-FreqCtrl; PROD_ID: XTAL-08895

## Nets
1.8V: C5.2 U2.12 U3.12 U5.1 U5.8
1.8V1: C15.2 U6.12 U7.12 U10.1 U10.8
1.8V2: C24.2 U11.12 U12.12 U15.1 U15.8
1.8V3: C32.2 U16.12 U17.12 U20.1 U20.8
1.8V4: C40.2 U21.12 U22.12 U25.1 U25.8
1.8V5: C48.2 U26.12 U27.12 U30.1 U30.8
1.8V6: C56.2 U31.12 U32.12 U35.1 U35.8
1.8V7: C64.2 U36.12 U37.12 U40.1 U40.8
3.3V: U2.8 U2.10 U3.8 U3.10
3.3V1: U6.8 U6.10 U7.8 U7.10
3.3V2: U11.8 U11.10 U12.8 U12.10
3.3V3: U16.8 U16.10 U17.8 U17.10
3.3V4: U21.8 U21.10 U22.8 U22.10
3.3V5: U26.8 U26.10 U27.8 U27.10
3.3V6: U31.8 U31.10 U32.8 U32.10
3.3V7: U36.8 U36.10 U37.8 U37.10
A0: JP2.8 U4.23
A1: JP2.7 U4.24
A2: JP2.6 U4.25
A3: JP2.5 U4.26
A4: JP4.1 U4.27
A5: JP4.2 U4.28
A6: JP5.1 U4.19
A7: JP5.2 U4.22
A8: JP9.2 U9.28
A9: JP9.1 U9.27
A10: JP7.5 U9.26
A11: JP7.6 U9.25
A12: JP7.7 U9.24
A13: JP7.8 U9.23
A14: JP10.1 U9.19
A15: JP10.2 U9.22
A16: JP14.2 U14.28
A17: JP14.1 U14.27
A18: JP12.5 U14.26
A19: JP12.6 U14.25
A20: JP12.7 U14.24
A21: JP12.8 U14.23
A22: JP15.1 U14.19
A23: JP15.2 U14.22
A24: JP19.2 U19.28
A25: JP19.1 U19.27
A26: JP17.5 U19.26
A27: JP17.6 U19.25
A28: JP17.7 U19.24
A29: JP17.8 U19.23
A30: JP20.1 U19.19
A31: JP20.2 U19.22
A32: JP24.2 U24.28
A33: JP24.1 U24.27
A34: JP22.5 U24.26
A35: JP22.6 U24.25
A36: JP22.7 U24.24
A37: JP22.8 U24.23
A38: JP25.1 U24.19
A39: JP25.2 U24.22
A40: JP29.2 U29.28
A41: JP29.1 U29.27
A42: JP27.5 U29.26
A43: JP27.6 U29.25
A44: JP27.7 U29.24
A45: JP27.8 U29.23
A46: JP30.1 U29.19
A47: JP30.2 U29.22
A48: JP34.2 U34.28
A49: JP34.1 U34.27
A50: JP32.5 U34.26
A51: JP32.6 U34.25
A52: JP32.7 U34.24
A53: JP32.8 U34.23
A54: JP35.1 U34.19
A55: JP35.2 U34.22
A56: JP39.2 U39.28
A57: JP39.1 U39.27
A58: JP37.5 U39.26
A59: JP37.6 U39.25
A60: JP37.7 U39.24
A61: JP37.8 U39.23
A62: JP40.1 U39.19
A63: JP40.2 U39.22
ARD_DTR: C2.2 JP1.1 U5.13
ARD_DTR1: C12.2 JP6.1 U10.13
ARD_DTR2: C22.2 JP11.1 U15.13
ARD_DTR3: C30.2 JP16.1 U20.13
ARD_DTR4: C38.2 JP21.1 U25.13
ARD_DTR5: C46.2 JP26.1 U30.13
ARD_DTR6: C54.2 JP31.1 U35.13
ARD_DTR7: C62.2 JP36.1 U40.13
ARD_RX: JP1.3 JP3.2 U4.30 U5.12
ARD_RX1: JP6.3 JP8.2 U9.30 U10.12
ARD_RX2: JP11.3 JP13.2 U14.30 U15.12
ARD_RX3: JP16.3 JP18.2 U19.30 U20.12
ARD_RX4: JP21.3 JP23.2 U24.30 U25.12
ARD_RX5: JP26.3 JP28.2 U29.30 U30.12
ARD_RX6: JP31.3 JP33.2 U34.30 U35.12
ARD_RX7: JP36.3 JP38.2 U39.30 U40.12
ARD_TX: JP1.2 JP3.1 U4.31 U5.11
ARD_TX1: JP6.2 JP8.1 U9.31 U10.11
ARD_TX2: JP11.2 JP13.1 U14.31 U15.11
ARD_TX3: JP16.2 JP18.1 U19.31 U20.11
ARD_TX4: JP21.2 JP23.1 U24.31 U25.11
ARD_TX5: JP26.2 JP28.1 U29.31 U30.11
ARD_TX6: JP31.2 JP33.1 U34.31 U35.11
ARD_TX7: JP36.2 JP38.1 U39.31 U40.11
AREF: C1.2 U4.20
AREF1: C9.2 U9.20
AREF2: C20.2 U14.20
AREF3: C28.2 U19.20
AREF4: C36.2 U24.20
AREF5: C44.2 U29.20
AREF6: C52.2 U34.20
AREF7: C60.2 U39.20
D1: JP8.12 U9.13
D2: JP3.5 U4.32
D3: JP3.6 U4.1
D4: JP3.7 U4.2
D5: JP3.8 U4.9
D6: JP3.9 U4.10
D7: JP3.10 U4.11
D8: JP3.11 U4.12
D9: JP3.12 U4.13
D10: JP2.12 U4.14
D11: JP8.11 U9.12
D12: JP8.5 U9.32
D13: JP8.6 U9.1
D14: JP8.7 U9.2
D15: JP8.8 U9.9
D16: JP8.9 U9.10
D17: JP8.10 U9.11
D18: JP7.12 U9.14
D19: JP13.12 U14.13
D20: JP13.11 U14.12
D21: JP13.5 U14.32
D22: JP13.6 U14.1
D23: JP13.7 U14.2
D24: JP13.8 U14.9
D25: JP13.9 U14.10
D26: JP13.10 U14.11
D27: JP12.12 U14.14
D28: JP18.12 U19.13
D29: JP18.11 U19.12
D30: JP18.5 U19.32
D31: JP18.6 U19.1
D32: JP18.7 U19.2
D33: JP18.8 U19.9
D34: JP18.9 U19.10
D35: JP18.10 U19.11
D36: JP17.12 U19.14
D37: JP23.12 U24.13
D38: JP23.11 U24.12
D39: JP23.5 U24.32
D40: JP23.6 U24.1
D41: JP23.7 U24.2
D42: JP23.8 U24.9
D43: JP23.9 U24.10
D44: JP23.10 U24.11
D45: JP22.12 U24.14
D46: JP28.12 U29.13
D47: JP28.11 U29.12
D48: JP28.5 U29.32
D49: JP28.6 U29.1
D50: JP28.7 U29.2
D51: JP28.8 U29.9
D52: JP28.9 U29.10
D53: JP28.10 U29.11
D54: JP27.12 U29.14
D55: JP33.12 U34.13
D56: JP33.11 U34.12
D57: JP33.5 U34.32
D58: JP33.6 U34.1
D59: JP33.7 U34.2
D60: JP33.8 U34.9
D61: JP33.9 U34.10
D62: JP33.10 U34.11
D63: JP32.12 U34.14
D64: JP38.12 U39.13
D65: JP38.11 U39.12
D66: JP38.5 U39.32
D67: JP38.6 U39.1
D68: JP38.7 U39.2
D69: JP38.8 U39.9
D70: JP38.9 U39.10
D71: JP38.10 U39.11
D72: JP37.12 U39.14
DCIN: SJ5.1 U2.14 U3.14
DCIN1: SJ10.1 U6.14 U7.14
DCIN2: SJ15.1 U11.14 U12.14
DCIN3: SJ20.1 U16.14 U17.14
DCIN4: SJ25.1 U21.14 U22.14
DCIN5: SJ30.1 U26.14 U27.14
DCIN6: SJ35.1 U31.14 U32.14
DCIN7: SJ40.1 U36.14 U37.14
ED_DTR: SJ3.2 U5.2
ED_DTR1: SJ9.2 U10.2
ED_DTR2: SJ14.2 U15.2
ED_DTR3: SJ19.2 U20.2
ED_DTR4: SJ24.2 U25.2
ED_DTR5: SJ29.2 U30.2
ED_DTR6: SJ34.2 U35.2
ED_DTR7: SJ39.2 U40.2
ED_RX: SJ2.2 U5.4
ED_RX1: SJ7.2 U10.4
ED_RX2: SJ12.2 U15.4
ED_RX3: SJ17.2 U20.4
ED_RX4: SJ22.2 U25.4
ED_RX5: SJ27.2 U30.4
ED_RX6: SJ32.2 U35.4
ED_RX7: SJ37.2 U40.4
ED_TX: SJ1.2 U5.3
ED_TX1: SJ6.2 U10.3
ED_TX2: SJ11.2 U15.3
ED_TX3: SJ16.2 U20.3
ED_TX4: SJ21.2 U25.3
ED_TX5: SJ26.2 U30.3
ED_TX6: SJ31.2 U35.3
ED_TX7: SJ36.2 U40.3
FAULT: U2.19 U3.19
FAULT1: U6.19 U7.19
FAULT2: U11.19 U12.19
FAULT3: U16.19 U17.19
FAULT4: U21.19 U22.19
FAULT5: U26.19 U27.19
FAULT6: U31.19 U32.19
FAULT7: U36.19 U37.19
FW_RCVR: U2.69 U3.69
FW_RCVR1: U6.69 U7.69
FW_RCVR2: U11.69 U12.69
FW_RCVR3: U16.69 U17.69
FW_RCVR4: U21.69 U22.69
FW_RCVR5: U26.69 U27.69
FW_RCVR6: U31.69 U32.69
FW_RCVR7: U36.69 U37.69
GND: C1.1 C3.1 C4.1 C5.1 C10.2 C13.C C19.C D3.C JP1.5 JP1.6 JP2.2 JP3.4 R11.1 S1.1 U1.2 U2.1 U2.5 U2.9 U2.11 U2.13 U2.15 U3.1 U3.5 U3.9 U3.11 U3.13 U3.15 U4.3 U4.5 U4.21 U5.7 Y1.2
GND1: C6.2 C7.C C8.1 C9.1 C11.C C14.1 C15.1 D1.C JP6.5 JP6.6 JP7.2 JP8.4 R1.1 S2.1 U6.1 U6.5 U6.9 U6.11 U6.13 U6.15 U7.1 U7.5 U7.9 U7.11 U7.13 U7.15 U8.2 U9.3 U9.5 U9.21 U10.7 Y2.2
GND2: C16.2 C17.C C18.1 C20.1 C21.C C23.1 C24.1 D2.C JP11.5 JP11.6 JP12.2 JP13.4 R5.1 S3.1 U11.1 U11.5 U11.9 U11.11 U11.13 U11.15 U12.1 U12.5 U12.9 U12.11 U12.13 U12.15 U13.2 U14.3 U14.5 U14.21 U15.7 Y3.2
GND3: C25.2 C26.C C27.1 C28.1 C29.C C31.1 C32.1 D4.C JP16.5 JP16.6 JP17.2 JP18.4 R9.1 S4.1 U16.1 U16.5 U16.9 U16.11 U16.13 U16.15 U17.1 U17.5 U17.9 U17.11 U17.13 U17.15 U18.2 U19.3 U19.5 U19.21 U20.7 Y4.2
GND4: C33.2 C34.C C35.1 C36.1 C37.C C39.1 C40.1 D5.C JP21.5 JP21.6 JP22.2 JP23.4 R13.1 S5.1 U21.1 U21.5 U21.9 U21.11 U21.13 U21.15 U22.1 U22.5 U22.9 U22.11 U22.13 U22.15 U23.2 U24.3 U24.5 U24.21 U25.7 Y5.2
GND5: C41.2 C42.C C43.1 C44.1 C45.C C47.1 C48.1 D6.C JP26.5 JP26.6 JP27.2 JP28.4 R16.1 S6.1 U26.1 U26.5 U26.9 U26.11 U26.13 U26.15 U27.1 U27.5 U27.9 U27.11 U27.13 U27.15 U28.2 U29.3 U29.5 U29.21 U30.7 Y6.2
GND6: C49.2 C50.C C51.1 C52.1 C53.C C55.1 C56.1 D7.C JP31.5 JP31.6 JP32.2 JP33.4 R19.1 S7.1 U31.1 U31.5 U31.9 U31.11 U31.13 U31.15 U32.1 U32.5 U32.9 U32.11 U32.13 U32.15 U33.2 U34.3 U34.5 U34.21 U35.7 Y7.2
GND7: C57.2 C58.C C59.1 C60.1 C61.C C63.1 C64.1 D8.C JP36.5 JP36.6 JP37.2 JP38.4 R22.1 S8.1 U36.1 U36.5 U36.9 U36.11 U36.13 U36.15 U37.1 U37.5 U37.9 U37.11 U37.13 U37.15 U38.2 U39.3 U39.5 U39.21 U40.7 Y8.2
GP1: U6.48 U7.48
GP2: U6.42 U7.42
GP3: U6.34 U7.34
GP4: U6.32 U7.32
GP5: U6.30 U7.30
GP6: U6.28 U7.28
GP7: U6.26 U7.26
GP8: SJ9.1 U6.25 U7.25
GP9: U6.24 U7.24
GP10: U11.48 U12.48
GP11: U11.42 U12.42
GP12: U11.34 U12.34
GP12_PWM0: U2.35 U3.35
GP12_PWM1: U6.35 U7.35
GP12_PWM2: U11.35 U12.35
GP12_PWM3: U16.35 U17.35
GP12_PWM4: U21.35 U22.35
GP12_PWM5: U26.35 U27.35
GP12_PWM6: U31.35 U32.35
GP12_PWM7: U36.35 U37.35
GP13: U11.32 U12.32
GP13_PWM1: U2.33 U3.33
GP13_PWM2: U6.33 U7.33
GP13_PWM3: U11.33 U12.33
GP13_PWM4: U16.33 U17.33
GP13_PWM5: U21.33 U22.33
GP13_PWM6: U26.33 U27.33
GP13_PWM7: U31.33 U32.33
GP13_PWM8: U36.33 U37.33
GP14: U2.48 U3.48
GP15: U2.42 U3.42
GP16: U11.30 U12.30
GP17: U11.28 U12.28
GP18: U11.26 U12.26
GP19: SJ14.1 U11.25 U12.25
GP19_I2C_1_SCL: U2.41 U3.41
GP19_I2C_1_SCL1: U6.41 U7.41
GP19_I2C_1_SCL2: U11.41 U12.41
GP19_I2C_1_SCL3: U16.41 U17.41
GP19_I2C_1_SCL4: U21.41 U22.41
GP19_I2C_1_SCL5: U26.41 U27.41
GP19_I2C_1_SCL6: U31.41 U32.41
GP19_I2C_1_SCL7: U36.41 U37.41
GP20: U11.24 U12.24
GP20_I2C_1_SDA: U2.43 U3.43
GP20_I2C_1_SDA1: U6.43 U7.43
GP20_I2C_1_SDA2: U11.43 U12.43
GP20_I2C_1_SDA3: U16.43 U17.43
GP20_I2C_1_SDA4: U21.43 U22.43
GP20_I2C_1_SDA5: U26.43 U27.43
GP20_I2C_1_SDA6: U31.43 U32.43
GP20_I2C_1_SDA7: U36.43 U37.43
GP21: U16.48 U17.48
GP22: U16.42 U17.42
GP23: U16.34 U17.34
GP24: U16.32 U17.32
GP25: U16.30 U17.30
GP26: U16.28 U17.28
GP27: U16.26 U17.26
GP27_I2C_6_SCL: U2.45 U3.45
GP27_I2C_6_SCL1: U6.45 U7.45
GP27_I2C_6_SCL2: U11.45 U12.45
GP27_I2C_6_SCL3: U16.45 U17.45
GP27_I2C_6_SCL4: U21.45 U22.45
GP27_I2C_6_SCL5: U26.45 U27.45
GP27_I2C_6_SCL6: U31.45 U32.45
GP27_I2C_6_SCL7: U36.45 U37.45
GP28: SJ19.1 U16.25 U17.25
GP28_I2C_6_SDA: U2.47 U3.47
GP28_I2C_6_SDA1: U6.47 U7.47
GP28_I2C_6_SDA2: U11.47 U12.47
GP28_I2C_6_SDA3: U16.47 U17.47
GP28_I2C_6_SDA4: U21.47 U22.47
GP28_I2C_6_SDA5: U26.47 U27.47
GP28_I2C_6_SDA6: U31.47 U32.47
GP28_I2C_6_SDA7: U36.47 U37.47
GP29: U16.24 U17.24
GP30: U21.48 U22.48
GP31: U21.42 U22.42
GP32: U21.34 U22.34
GP33: U21.32 U22.32
GP34: U21.30 U22.30
GP35: U21.28 U22.28
GP36: U21.26 U22.26
GP37: SJ24.1 U21.25 U22.25
GP38: U21.24 U22.24
GP39: U26.48 U27.48
GP40: U26.42 U27.42
GP40_I2S_2_CLK: U2.52 U3.52
GP40_I2S_2_CLK1: U6.52 U7.52
GP40_I2S_2_CLK2: U11.52 U12.52
GP40_I2S_2_CLK3: U16.52 U17.52
GP40_I2S_2_CLK4: U21.52 U22.52
GP40_I2S_2_CLK5: U26.52 U27.52
GP40_I2S_2_CLK6: U31.52 U32.52
GP40_I2S_2_CLK7: U36.52 U37.52
GP41: U26.34 U27.34
GP41_I2S_2_FS: U2.54 U3.54
GP41_I2S_2_FS1: U6.54 U7.54
GP41_I2S_2_FS2: U11.54 U12.54
GP41_I2S_2_FS3: U16.54 U17.54
GP41_I2S_2_FS4: U21.54 U22.54
GP41_I2S_2_FS5: U26.54 U27.54
GP41_I2S_2_FS6: U31.54 U32.54
GP41_I2S_2_FS7: U36.54 U37.54
GP42: U26.32 U27.32
GP42_I2S_2_RXD: U2.50 U3.50
GP42_I2S_2_RXD1: U6.50 U7.50
GP42_I2S_2_RXD2: U11.50 U12.50
GP42_I2S_2_RXD3: U16.50 U17.50
GP42_I2S_2_RXD4: U21.50 U22.50
GP42_I2S_2_RXD5: U26.50 U27.50
GP42_I2S_2_RXD6: U31.50 U32.50
GP42_I2S_2_RXD7: U36.50 U37.50
GP43: U26.30 U27.30
GP43_I2S_2_TXD: U2.56 U3.56
GP43_I2S_2_TXD1: U6.56 U7.56
GP43_I2S_2_TXD2: U11.56 U12.56
GP43_I2S_2_TXD3: U16.56 U17.56
GP43_I2S_2_TXD4: U21.56 U22.56
GP43_I2S_2_TXD5: U26.56 U27.56
GP43_I2S_2_TXD6: U31.56 U32.56
GP43_I2S_2_TXD7: U36.56 U37.56
GP44: U2.24 U3.24
GP45: U2.26 U3.26
GP46: U2.28 U3.28
GP47: U2.30 U3.30
GP48: U2.32 U3.32
GP49: U2.34 U3.34
GP50: U26.28 U27.28
GP51: U26.26 U27.26
GP52: SJ29.1 U26.25 U27.25
GP53: U26.24 U27.24
GP54: U31.48 U32.48
GP55: U31.42 U32.42
GP56: U31.34 U32.34
GP57: U31.32 U32.32
GP58: U31.30 U32.30
GP59: U31.28 U32.28
GP60: U31.26 U32.26
GP61: SJ34.1 U31.25 U32.25
GP62: U31.24 U32.24
GP63: U36.48 U37.48
GP64: U36.42 U37.42
GP65: U36.34 U37.34
GP66: U36.32 U37.32
GP67: U36.30 U37.30
GP68: U36.28 U37.28
GP69: U36.26 U37.26
GP70: SJ39.1 U36.25 U37.25
GP71: U36.24 U37.24
GP77_SD_0_CD#: U2.60 U3.60
GP77_SD_0_CD#1: U6.60 U7.60
GP77_SD_0_CD#2: U11.60 U12.60
GP77_SD_0_CD#3: U16.60 U17.60
GP77_SD_0_CD#4: U21.60 U22.60
GP77_SD_0_CD#5: U26.60 U27.60
GP77_SD_0_CD#6: U31.60 U32.60
GP77_SD_0_CD#7: U36.60 U37.60
GP78_SD_0_CLK: U2.58 U3.58
GP78_SD_0_CLK1: U6.58 U7.58
GP78_SD_0_CLK2: U11.58 U12.58
GP78_SD_0_CLK3: U16.58 U17.58
GP78_SD_0_CLK4: U21.58 U22.58
GP78_SD_0_CLK5: U26.58 U27.58
GP78_SD_0_CLK6: U31.58 U32.58
GP78_SD_0_CLK7: U36.58 U37.58
GP79_SD_0_CMD: U2.62 U3.62
GP79_SD_0_CMD1: U6.62 U7.62
GP79_SD_0_CMD2: U11.62 U12.62
GP79_SD_0_CMD3: U16.62 U17.62
GP79_SD_0_CMD4: U21.62 U22.62
GP79_SD_0_CMD5: U26.62 U27.62
GP79_SD_0_CMD6: U31.62 U32.62
GP79_SD_0_CMD7: U36.62 U37.62
GP80_SD_0_DAT0: U2.66 U3.66
GP80_SD_0_DAT1: U6.66 U7.66
GP80_SD_0_DAT2: U11.66 U12.66
GP80_SD_0_DAT3: U16.66 U17.66
GP80_SD_0_DAT4: U21.66 U22.66
GP80_SD_0_DAT5: U26.66 U27.66
GP80_SD_0_DAT6: U31.66 U32.66
GP80_SD_0_DAT7: U36.66 U37.66
GP81_SD_0_DAT1: U2.70 U3.70
GP81_SD_0_DAT2: U6.70 U7.70
GP81_SD_0_DAT3: U11.70 U12.70
GP81_SD_0_DAT4: U16.70 U17.70
GP81_SD_0_DAT5: U21.70 U22.70
GP81_SD_0_DAT6: U26.70 U27.70
GP81_SD_0_DAT7: U31.70 U32.70
GP81_SD_0_DAT8: U36.70 U37.70
GP82_SD_0_DAT1: U6.64 U7.64
GP82_SD_0_DAT2: U2.64 U3.64
GP82_SD_0_DAT3: U11.64 U12.64
GP82_SD_0_DAT4: U16.64 U17.64
GP82_SD_0_DAT5: U21.64 U22.64
GP82_SD_0_DAT6: U26.64 U27.64
GP82_SD_0_DAT7: U31.64 U32.64
GP82_SD_0_DAT8: U36.64 U37.64
GP83_SD_0_DAT1: U6.68 U7.68
GP83_SD_0_DAT2: U11.68 U12.68
GP83_SD_0_DAT3: U2.68 U3.68
GP83_SD_0_DAT4: U16.68 U17.68
GP83_SD_0_DAT5: U21.68 U22.68
GP83_SD_0_DAT6: U26.68 U27.68
GP83_SD_0_DAT7: U31.68 U32.68
GP83_SD_0_DAT8: U36.68 U37.68
GP84_SD_CLK_FB: U2.44 U3.44
GP84_SD_CLK_FB1: U6.44 U7.44
GP84_SD_CLK_FB2: U11.44 U12.44
GP84_SD_CLK_FB3: U16.44 U17.44
GP84_SD_CLK_FB4: U21.44 U22.44
GP84_SD_CLK_FB5: U26.44 U27.44
GP84_SD_CLK_FB6: U31.44 U32.44
GP84_SD_CLK_FB7: U36.44 U37.44
GP109_SPI_2_CLK: U2.55 U3.55
GP109_SPI_2_CLK1: U6.55 U7.55
GP109_SPI_2_CLK2: U11.55 U12.55
GP109_SPI_2_CLK3: U16.55 U17.55
GP109_SPI_2_CLK4: U21.55 U22.55
GP109_SPI_2_CLK5: U26.55 U27.55
GP109_SPI_2_CLK6: U31.55 U32.55
GP109_SPI_2_CLK7: U36.55 U37.55
GP110_SPI_2_FS0: U2.53 U3.53
GP110_SPI_2_FS1: U6.53 U7.53
GP110_SPI_2_FS2: U11.53 U12.53
GP110_SPI_2_FS3: U16.53 U17.53
GP110_SPI_2_FS4: U21.53 U22.53
GP110_SPI_2_FS5: U26.53 U27.53
GP110_SPI_2_FS6: U31.53 U32.53
GP110_SPI_2_FS7: U36.53 U37.53
GP111_SPI_2_FS1: U2.51 U3.51
GP111_SPI_2_FS2: U6.51 U7.51
GP111_SPI_2_FS3: U11.51 U12.51
GP111_SPI_2_FS4: U16.51 U17.51
GP111_SPI_2_FS5: U21.51 U22.51
GP111_SPI_2_FS6: U26.51 U27.51
GP111_SPI_2_FS7: U31.51 U32.51
GP111_SPI_2_FS8: U36.51 U37.51
GP114_SPI_2_RXD: U2.59 U3.59
GP114_SPI_2_RXD1: U6.59 U7.59
GP114_SPI_2_RXD2: U11.59 U12.59
GP114_SPI_2_RXD3: U16.59 U17.59
GP114_SPI_2_RXD4: U21.59 U22.59
GP114_SPI_2_RXD5: U26.59 U27.59
GP114_SPI_2_RXD6: U31.59 U32.59
GP114_SPI_2_RXD7: U36.59 U37.59
GP115_SPI_2_TXD: U2.57 U3.57
GP115_SPI_2_TXD1: U6.57 U7.57
GP115_SPI_2_TXD2: U11.57 U12.57
GP115_SPI_2_TXD3: U16.57 U17.57
GP115_SPI_2_TXD4: U21.57 U22.57
GP115_SPI_2_TXD5: U26.57 U27.57
GP115_SPI_2_TXD6: U31.57 U32.57
GP115_SPI_2_TXD7: U36.57 U37.57
GP128_UART_1_CTS: U2.65 U3.65
GP128_UART_1_CTS1: U6.65 U7.65
GP128_UART_1_CTS2: U11.65 U12.65
GP128_UART_1_CTS3: U16.65 U17.65
GP128_UART_1_CTS4: U21.65 U22.65
GP128_UART_1_CTS5: U26.65 U27.65
GP128_UART_1_CTS6: U31.65 U32.65
GP128_UART_1_CTS7: U36.65 U37.65
GP129_UART_1_RTS: SJ3.3 U2.63 U3.63
GP129_UART_1_RTS1: SJ9.3 U6.63 U7.63
GP129_UART_1_RTS2: SJ14.3 U11.63 U12.63
GP129_UART_1_RTS3: SJ19.3 U16.63 U17.63
GP129_UART_1_RTS4: SJ24.3 U21.63 U22.63
GP129_UART_1_RTS5: SJ29.3 U26.63 U27.63
GP129_UART_1_RTS6: SJ34.3 U31.63 U32.63
GP129_UART_1_RTS7: SJ39.3 U36.63 U37.63
GP130_UART_1_RX: SJ2.3 U2.61 U3.61
GP130_UART_1_RX1: SJ7.3 U6.61 U7.61
GP130_UART_1_RX2: SJ12.3 U11.61 U12.61
GP130_UART_1_RX3: SJ17.3 U16.61 U17.61
GP130_UART_1_RX4: SJ22.3 U21.61 U22.61
GP130_UART_1_RX5: SJ27.3 U26.61 U27.61
GP130_UART_1_RX6: SJ32.3 U31.61 U32.61
GP130_UART_1_RX7: SJ37.3 U36.61 U37.61
GP131_UART_1_TX: SJ1.3 U2.46 U3.46
GP131_UART_1_TX1: SJ6.3 U6.46 U7.46
GP131_UART_1_TX2: SJ11.3 U11.46 U12.46
GP131_UART_1_TX3: SJ16.3 U16.46 U17.46
GP131_UART_1_TX4: SJ21.3 U21.46 U22.46
GP131_UART_1_TX5: SJ26.3 U26.46 U27.46
GP131_UART_1_TX6: SJ31.3 U31.46 U32.46
GP131_UART_1_TX7: SJ36.3 U36.46 U37.46
GP134_UART_2_RX: SJ2.1 U2.22 U3.22
GP134_UART_2_RX1: SJ7.1 U6.22 U7.22
GP134_UART_2_RX2: SJ12.1 U11.22 U12.22
GP134_UART_2_RX3: SJ17.1 U16.22 U17.22
GP134_UART_2_RX4: SJ22.1 U21.22 U22.22
GP134_UART_2_RX5: SJ27.1 U26.22 U27.22
GP134_UART_2_RX6: SJ32.1 U31.22 U32.22
GP134_UART_2_RX7: SJ37.1 U36.22 U37.22
GP135_UART_2_TX: SJ1.1 U2.27 U3.27
GP135_UART_2_TX1: SJ6.1 U6.27 U7.27
GP135_UART_2_TX2: SJ11.1 U11.27 U12.27
GP135_UART_2_TX3: SJ16.1 U16.27 U17.27
GP135_UART_2_TX4: SJ21.1 U21.27 U22.27
GP135_UART_2_TX5: SJ26.1 U26.27 U27.27
GP135_UART_2_TX6: SJ31.1 U31.27 U32.27
GP135_UART_2_TX7: SJ36.1 U36.27 U37.27
GP165: SJ3.1 U2.25 U3.25
GP182_PWM1: U6.37 U7.37
GP182_PWM2: U2.37 U3.37
GP182_PWM3: U11.37 U12.37
GP182_PWM4: U16.37 U17.37
GP182_PWM5: U21.37 U22.37
GP182_PWM6: U26.37 U27.37
GP182_PWM7: U31.37 U32.37
GP182_PWM8: U36.37 U37.37
GP183_PWM1: U6.39 U7.39
GP183_PWM2: U11.39 U12.39
GP183_PWM3: U2.39 U3.39
GP183_PWM4: U16.39 U17.39
GP183_PWM5: U21.39 U22.39
GP183_PWM6: U26.39 U27.39
GP183_PWM7: U31.39 U32.39
GP183_PWM8: U36.39 U37.39
MISO: JP2.10 U4.16
MISO1: JP7.10 U9.16
MISO2: JP12.10 U14.16
MISO3: JP17.10 U19.16
MISO4: JP22.10 U24.16
MISO5: JP27.10 U29.16
MISO6: JP32.10 U34.16
MISO7: JP37.10 U39.16
MOSI: JP2.11 U4.15
MOSI1: JP7.11 U9.15
MOSI2: JP12.11 U14.15
MOSI3: JP17.11 U19.15
MOSI4: JP22.11 U24.15
MOSI5: JP27.11 U29.15
MOSI6: JP32.11 U34.15
MOSI7: JP37.11 U39.15
MSIC_SLP_CLK: U2.7 U3.7
MSIC_SLP_CLK1: U6.7 U7.7
MSIC_SLP_CLK2: U11.7 U12.7
MSIC_SLP_CLK3: U16.7 U17.7
MSIC_SLP_CLK4: U21.7 U22.7
MSIC_SLP_CLK5: U26.7 U27.7
MSIC_SLP_CLK6: U31.7 U32.7
MSIC_SLP_CLK7: U36.7 U37.7
N$1: U4.8 Y1.3
N$2: U4.7 Y1.1
N$3: D1.A R4.2
N$4: LED1.C R11.2
N$5: U9.8 Y2.3
N$6: U9.7 Y2.1
N$7: D3.A R6.2
N$8: LED2.C R1.2
N$9: D2.A R8.2
N$10: U14.8 Y3.3
N$11: U14.7 Y3.1
N$12: LED3.C R5.2
N$13: D4.A R12.2
N$14: U19.8 Y4.3
N$15: U19.7 Y4.1
N$16: LED4.C R9.2
N$17: D5.A R15.2
N$18: U24.8 Y5.3
N$19: U24.7 Y5.1
N$20: LED5.C R13.2
N$21: D6.A R18.2
N$22: U29.8 Y6.3
N$23: U29.7 Y6.1
N$24: LED6.C R16.2
N$25: D7.A R21.2
N$26: U34.8 Y7.3
N$27: U34.7 Y7.1
N$28: LED7.C R19.2
N$29: D8.A R24.2
N$30: U39.8 Y8.3
N$31: U39.7 Y8.1
N$32: LED8.C R22.2
OSC_CLK_OUT: U2.67 U3.67
OSC_CLK_OUT1: U6.67 U7.67
OSC_CLK_OUT2: U11.67 U12.67
OSC_CLK_OUT3: U16.67 U17.67
OSC_CLK_OUT4: U21.67 U22.67
OSC_CLK_OUT5: U26.67 U27.67
OSC_CLK_OUT6: U31.67 U32.67
OSC_CLK_OUT7: U36.67 U37.67
PSW: U2.21 U3.21
PSW1: U6.21 U7.21
PSW2: U11.21 U12.21
PSW3: U16.21 U17.21
PSW4: U21.21 U22.21
PSW5: U26.21 U27.21
PSW6: U31.21 U32.21
PSW7: U36.21 U37.21
PWRBTN#: U2.17 U3.17
PWRBTN#1: U6.17 U7.17
PWRBTN#2: U11.17 U12.17
PWRBTN#3: U16.17 U17.17
PWRBTN#4: U21.17 U22.17
PWRBTN#5: U26.17 U27.17
PWRBTN#6: U31.17 U32.17
PWRBTN#7: U36.17 U37.17
RCVR_MODE: U2.31 U3.31
RCVR_MODE1: U6.31 U7.31
RCVR_MODE2: U11.31 U12.31
RCVR_MODE3: U16.31 U17.31
RCVR_MODE4: U21.31 U22.31
RCVR_MODE5: U26.31 U27.31
RCVR_MODE6: U31.31 U32.31
RCVR_MODE7: U36.31 U37.31
RESET: C2.1 JP2.3 JP3.3 R2.1 S1.2 U4.29
RESET1: C12.1 JP7.3 JP8.3 R3.1 S2.2 U9.29
RESET2: C22.1 JP12.3 JP13.3 R7.1 S3.2 U14.29
RESET3: C30.1 JP17.3 JP18.3 R10.1 S4.2 U19.29
RESET4: C38.1 JP22.3 JP23.3 R14.1 S5.2 U24.29
RESET5: C46.1 JP27.3 JP28.3 R17.1 S6.2 U29.29
RESET6: C54.1 JP32.3 JP33.3 R20.1 S7.2 U34.29
RESET7: C62.1 JP37.3 JP38.3 R23.1 S8.2 U39.29
RESET_OUT#: U2.36 U3.36
RESET_OUT#1: U6.36 U7.36
RESET_OUT#2: U11.36 U12.36
RESET_OUT#3: U16.36 U17.36
RESET_OUT#4: U21.36 U22.36
RESET_OUT#5: U26.36 U27.36
RESET_OUT#6: U31.36 U32.36
RESET_OUT#7: U36.36 U37.36
SCK: JP2.9 R6.1 U4.17
SCK1: JP7.9 R4.1 U9.17
SCK2: JP12.9 R8.1 U14.17
SCK3: JP17.9 R12.1 U19.17
SCK4: JP22.9 R15.1 U24.17
SCK5: JP27.9 R18.1 U29.17
SCK6: JP32.9 R21.1 U34.17
SCK7: JP37.9 R24.1 U39.17
USB_DN: U2.18 U3.18
USB_DN1: U6.18 U7.18
USB_DN2: U11.18 U12.18
USB_DN3: U16.18 U17.18
USB_DN4: U21.18 U22.18
USB_DN5: U26.18 U27.18
USB_DN6: U31.18 U32.18
USB_DN7: U36.18 U37.18
USB_DP: U2.16 U3.16
USB_DP1: U6.16 U7.16
USB_DP2: U11.16 U12.16
USB_DP3: U16.16 U17.16
USB_DP4: U21.16 U22.16
USB_DP5: U26.16 U27.16
USB_DP6: U31.16 U32.16
USB_DP7: U36.16 U37.16
USB_ID: U2.3 U3.3
USB_ID1: U6.3 U7.3
USB_ID2: U11.3 U12.3
USB_ID3: U16.3 U17.3
USB_ID4: U21.3 U22.3
USB_ID5: U26.3 U27.3
USB_ID6: U31.3 U32.3
USB_ID7: U36.3 U37.3
USB_VBUS: U2.20 U3.20
USB_VBUS1: U6.20 U7.20
USB_VBUS2: U11.20 U12.20
USB_VBUS3: U16.20 U17.20
USB_VBUS4: U21.20 U22.20
USB_VBUS5: U26.20 U27.20
USB_VBUS6: U31.20 U32.20
USB_VBUS7: U36.20 U37.20
V_BAT_BKUP: U2.23 U3.23
V_BAT_BKUP1: U6.23 U7.23
V_BAT_BKUP2: U11.23 U12.23
V_BAT_BKUP3: U16.23 U17.23
V_BAT_BKUP4: U21.23 U22.23
V_BAT_BKUP5: U26.23 U27.23
V_BAT_BKUP6: U31.23 U32.23
V_BAT_BKUP7: U36.23 U37.23
VCC: C3.2 C4.2 C10.1 C13.A JP1.4 JP2.4 LED1.A R2.2 U1.5 U4.4 U4.6 U4.18 U5.14
VCC1: C6.1 C7.A C8.2 C14.2 JP6.4 JP7.4 LED2.A R3.2 U8.5 U9.4 U9.6 U9.18 U10.14
VCC2: C16.1 C17.A C18.2 C23.2 JP11.4 JP12.4 LED3.A R7.2 U13.5 U14.4 U14.6 U14.18 U15.14
VCC3: C25.1 C26.A C27.2 C31.2 JP16.4 JP17.4 LED4.A R10.2 U18.5 U19.4 U19.6 U19.18 U20.14
VCC4: C33.1 C34.A C35.2 C39.2 JP21.4 JP22.4 LED5.A R14.2 U23.5 U24.4 U24.6 U24.18 U25.14
VCC5: C41.1 C42.A C43.2 C47.2 JP26.4 JP27.4 LED6.A R17.2 U28.5 U29.4 U29.6 U29.18 U30.14
VCC6: C49.1 C50.A C51.2 C55.2 JP31.4 JP32.4 LED7.A R20.2 U33.5 U34.4 U34.6 U34.18 U35.14
VCC7: C57.1 C58.A C59.2 C63.2 JP36.4 JP37.4 LED8.A R23.2 U38.5 U39.4 U39.6 U39.18 U40.14
VIN: C19.A JP2.1 SJ4.2 U1.1 U1.3
VIN1: C11.A JP7.1 SJ8.2 U8.1 U8.3
VIN2: C21.A JP12.1 SJ13.2 U13.1 U13.3
VIN3: C29.A JP17.1 SJ18.2 U18.1 U18.3
VIN4: C37.A JP22.1 SJ23.2 U23.1 U23.3
VIN5: C45.A JP27.1 SJ28.2 U28.1 U28.3
VIN6: C53.A JP32.1 SJ33.2 U33.1 U33.3
VIN7: C61.A JP37.1 SJ38.2 U38.1 U38.3
VSYS: SJ4.1 SJ5.2 U2.2 U2.4 U2.6 U3.2 U3.4 U3.6
VSYS1: SJ8.1 SJ10.2 U6.2 U6.4 U6.6 U7.2 U7.4 U7.6
VSYS2: SJ13.1 SJ15.2 U11.2 U11.4 U11.6 U12.2 U12.4 U12.6
VSYS3: SJ18.1 SJ20.2 U16.2 U16.4 U16.6 U17.2 U17.4 U17.6
VSYS4: SJ23.1 SJ25.2 U21.2 U21.4 U21.6 U22.2 U22.4 U22.6
VSYS5: SJ28.1 SJ30.2 U26.2 U26.4 U26.6 U27.2 U27.4 U27.6
VSYS6: SJ33.1 SJ35.2 U31.2 U31.4 U31.6 U32.2 U32.4 U32.6
VSYS7: SJ38.1 SJ40.2 U36.2 U36.4 U36.6 U37.2 U37.4 U37.6

## Tracks (layer width: path | path; a pad name or v marks a point on that pad's centre or on a via)
1.8V  (via drill 0.33)
  Top 0.152: U3.12 31.14,27.84 v30.18,28.8 | 17.78,27.18 U5.8
  Top 0.203: U3.12 33.05,27.84 33.15,27.94 33.15,30.35 32.05,31.45 28.4,31.45 25.4,28.45 19.56,28.45 18.67,27.56 18.67,27.18 | 17.78,27.18 18.67,27.18 | U5.1 19.56,19.56 18.67,20.45 18.67,27.18
  Top 0.254: C5.2 23.71,18.45 23.12,19.04 U5.1
  Bottom 0.152: U3.12 31.14,27.84 v30.18,28.8
1.8V1  (via drill 0.33)
  Top 0.152: U7.12 64.16,27.84 v63.2,28.8 | 50.8,27.18 U10.8
  Top 0.203: U7.12 66.06,27.84 66.17,27.94 66.17,30.35 65.08,31.45 61.42,31.45 58.42,28.45 52.58,28.45 51.69,27.56 51.69,27.18 | 50.8,27.18 51.69,27.18 | U10.1 52.58,19.56 51.69,20.45 51.69,27.18
  Top 0.254: C15.2 56.73,18.45 56.14,19.04 U10.1
  Bottom 0.152: U7.12 64.16,27.84 v63.2,28.8
1.8V2  (via drill 0.33)
  Top 0.152: U12.12 97.18,27.84 v96.22,28.8 | 83.82,27.18 U15.8
  Top 0.203: U12.12 99.08,27.84 99.19,27.94 99.19,30.35 98.09,31.45 94.44,31.45 91.44,28.45 85.6,28.45 84.71,27.56 84.71,27.18 | 83.82,27.18 84.71,27.18 | U15.1 85.6,19.56 84.71,20.45 84.71,27.18
  Top 0.254: C24.2 89.75,18.45 89.16,19.04 U15.1
  Bottom 0.152: U12.12 97.18,27.84 v96.22,28.8
1.8V3  (via drill 0.33)
  Top 0.152: U17.12 130.2,27.84 v129.24,28.8 | 116.84,27.18 U20.8
  Top 0.203: U17.12 132.1,27.84 132.21,27.94 132.21,30.35 131.12,31.45 127.46,31.45 124.46,28.45 118.62,28.45 117.73,27.56 117.73,27.18 | 116.84,27.18 117.73,27.18 | U20.1 118.62,19.56 117.73,20.45 117.73,27.18
  Top 0.254: C32.2 122.77,18.45 122.18,19.04 U20.1
  Bottom 0.152: U17.12 130.2,27.84 v129.24,28.8
1.8V4  (via drill 0.33)
  Top 0.152: U22.12 31.14,90.58 v30.18,91.54 | 17.78,89.92 U25.8
  Top 0.203: U22.12 33.05,90.58 33.15,90.68 33.15,93.09 32.05,94.18 28.4,94.18 25.4,91.19 19.56,91.19 18.67,90.3 18.67,89.92 | 17.78,89.92 18.67,89.92 | U25.1 19.56,82.3 18.67,83.19 18.67,89.92
  Top 0.254: C40.2 23.71,81.19 23.12,81.78 U25.1
  Bottom 0.152: U22.12 31.14,90.58 v30.18,91.54
1.8V5  (via drill 0.33)
  Top 0.152: U27.12 64.16,90.58 v63.2,91.54 | 50.8,89.92 U30.8
  Top 0.203: U27.12 66.06,90.58 66.17,90.68 66.17,93.09 65.08,94.18 61.42,94.18 58.42,91.19 52.58,91.19 51.69,90.3 51.69,89.92 | 50.8,89.92 51.69,89.92 | U30.1 52.58,82.3 51.69,83.19 51.69,89.92
  Top 0.254: C48.2 56.73,81.19 56.14,81.78 U30.1
  Bottom 0.152: U27.12 64.16,90.58 v63.2,91.54
1.8V6  (via drill 0.33)
  Top 0.152: U32.12 97.18,90.58 v96.22,91.54 | 83.82,89.92 U35.8
  Top 0.203: U32.12 99.08,90.58 99.19,90.68 99.19,93.09 98.09,94.18 94.44,94.18 91.44,91.19 85.6,91.19 84.71,90.3 84.71,89.92 | 83.82,89.92 84.71,89.92 | U35.1 85.6,82.3 84.71,83.19 84.71,89.92
  Top 0.254: C56.2 89.75,81.19 89.16,81.78 U35.1
  Bottom 0.152: U32.12 97.18,90.58 v96.22,91.54
1.8V7  (via drill 0.33)
  Top 0.152: U37.12 130.2,90.58 v129.24,91.54 | 116.84,89.92 U40.8
  Top 0.203: U37.12 132.1,90.58 132.21,90.68 132.21,93.09 131.12,94.18 127.46,94.18 124.46,91.19 118.62,91.19 117.73,90.3 117.73,89.92 | 116.84,89.92 117.73,89.92 | U40.1 118.62,82.3 117.73,83.19 117.73,89.92
  Top 0.254: C64.2 122.77,81.19 122.18,81.78 U40.1
  Bottom 0.152: U37.12 130.2,90.58 v129.24,91.54
3.3V  (via drill 0.33)
  Top 0.152: U3.10 31.2,28.24 30.86,28.57 30.86,28.65 | 30.86,28.65 30.86,29.08 30.16,29.78 v29.75,29.78 | U3.8 30.87,28.64 30.86,28.65
  Bottom 0.152: U3.10 | U3.10 31.2,28.24 30.86,28.57 30.86,28.64 | 30.86,28.64 30.86,29.08 30.16,29.78 v29.75,29.78 | U3.8 30.86,28.64
3.3V1  (via drill 0.33)
  Top 0.152: U7.10 64.22,28.24 63.88,28.57 63.88,28.65 | 63.88,28.65 63.88,29.08 63.18,29.78 v62.77,29.78 | U7.8 63.89,28.64 63.88,28.65
  Bottom 0.152: U7.10 | U7.10 64.22,28.24 63.88,28.57 63.88,28.64 | 63.88,28.64 63.88,29.08 63.18,29.78 v62.77,29.78 | U7.8 63.88,28.64
3.3V2  (via drill 0.33)
  Top 0.152: U12.10 97.24,28.24 96.9,28.57 96.9,28.65 | 96.9,28.65 96.9,29.08 96.2,29.78 v95.79,29.78 | U12.8 96.91,28.64 96.9,28.65
  Bottom 0.152: U12.10 | U12.10 97.24,28.24 96.9,28.57 96.9,28.64 | 96.9,28.64 96.9,29.08 96.2,29.78 v95.79,29.78 | U12.8 96.9,28.64
3.3V3  (via drill 0.33)
  Top 0.152: U17.10 130.26,28.24 129.92,28.57 129.92,28.65 | 129.92,28.65 129.92,29.08 129.22,29.78 v128.81,29.78 | U17.8 129.93,28.64 129.92,28.65
  Bottom 0.152: U17.10 | U17.10 130.26,28.24 129.92,28.57 129.92,28.64 | 129.92,28.64 129.92,29.08 129.22,29.78 v128.81,29.78 | U17.8 129.92,28.64
3.3V4  (via drill 0.33)
  Top 0.152: U22.10 31.2,90.98 30.86,91.31 30.86,91.39 | 30.86,91.39 30.86,91.82 30.16,92.52 v29.75,92.52 | U22.8 30.87,91.38 30.86,91.39
  Bottom 0.152: U22.10 | U22.10 31.2,90.98 30.86,91.31 30.86,91.38 | 30.86,91.38 30.86,91.82 30.16,92.52 v29.75,92.52 | U22.8 30.86,91.38 | 30.86,91.38
3.3V5  (via drill 0.33)
  Top 0.152: U27.10 64.22,90.98 63.88,91.31 63.88,91.39 | 63.88,91.39 63.88,91.82 63.18,92.52 v62.77,92.52 | U27.8 63.89,91.38 63.88,91.39
  Bottom 0.152: U27.10 | U27.10 64.22,90.98 63.88,91.31 63.88,91.38 | 63.88,91.38 63.88,91.82 63.18,92.52 v62.77,92.52 | U27.8 63.88,91.38
3.3V6  (via drill 0.33)
  Top 0.152: U32.10 97.24,90.98 96.9,91.31 96.9,91.39 | 96.9,91.39 96.9,91.82 96.2,92.52 v95.79,92.52 | U32.8 96.91,91.38 96.9,91.39
  Bottom 0.152: U32.10 | U32.10 97.24,90.98 96.9,91.31 96.9,91.38 | 96.9,91.38 96.9,91.82 96.2,92.52 v95.79,92.52 | U32.8 96.9,91.38 | 96.9,91.38
3.3V7  (via drill 0.33)
  Top 0.152: U37.10 130.26,90.98 129.92,91.31 129.92,91.39 | 129.92,91.39 129.92,91.82 129.22,92.52 v128.81,92.52 | U37.8 129.93,91.38 129.92,91.39
  Bottom 0.152: U37.10 | U37.10 130.26,90.98 129.92,91.31 129.92,91.38 | 129.92,91.38 129.92,91.82 129.22,92.52 v128.81,92.52 | U37.8 129.92,91.38
A0